# Allegro board RK3568_Template_LP4XD200P132SD6_43x28_1600MHz_V10_20210201.brd
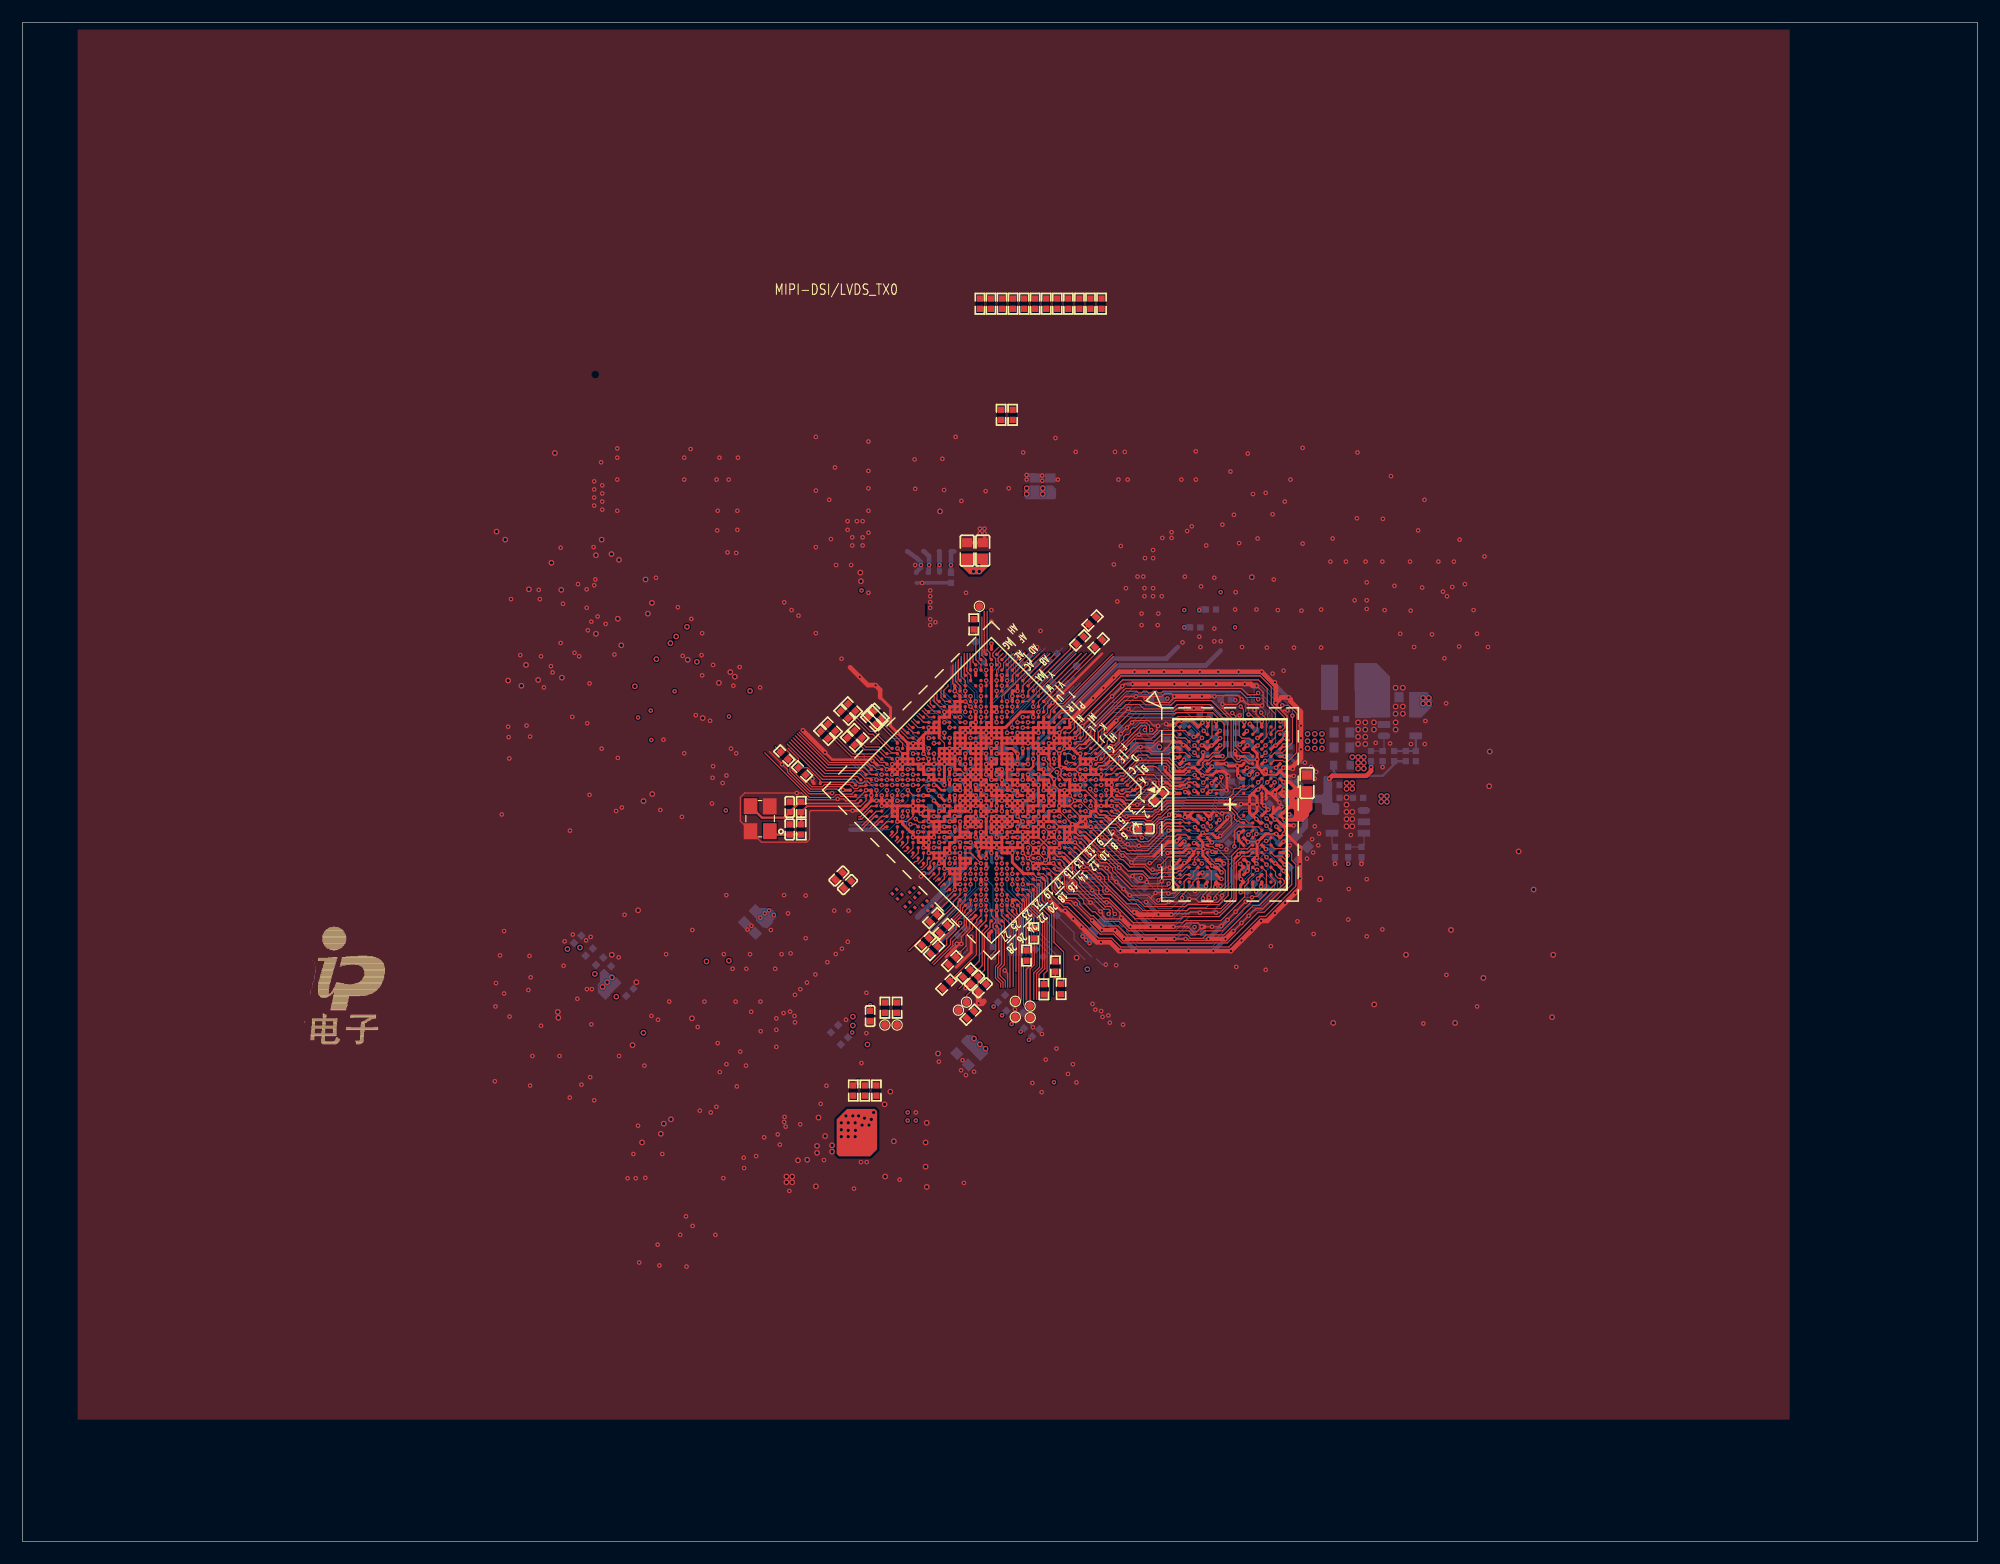
[diagram p0: board, top side]
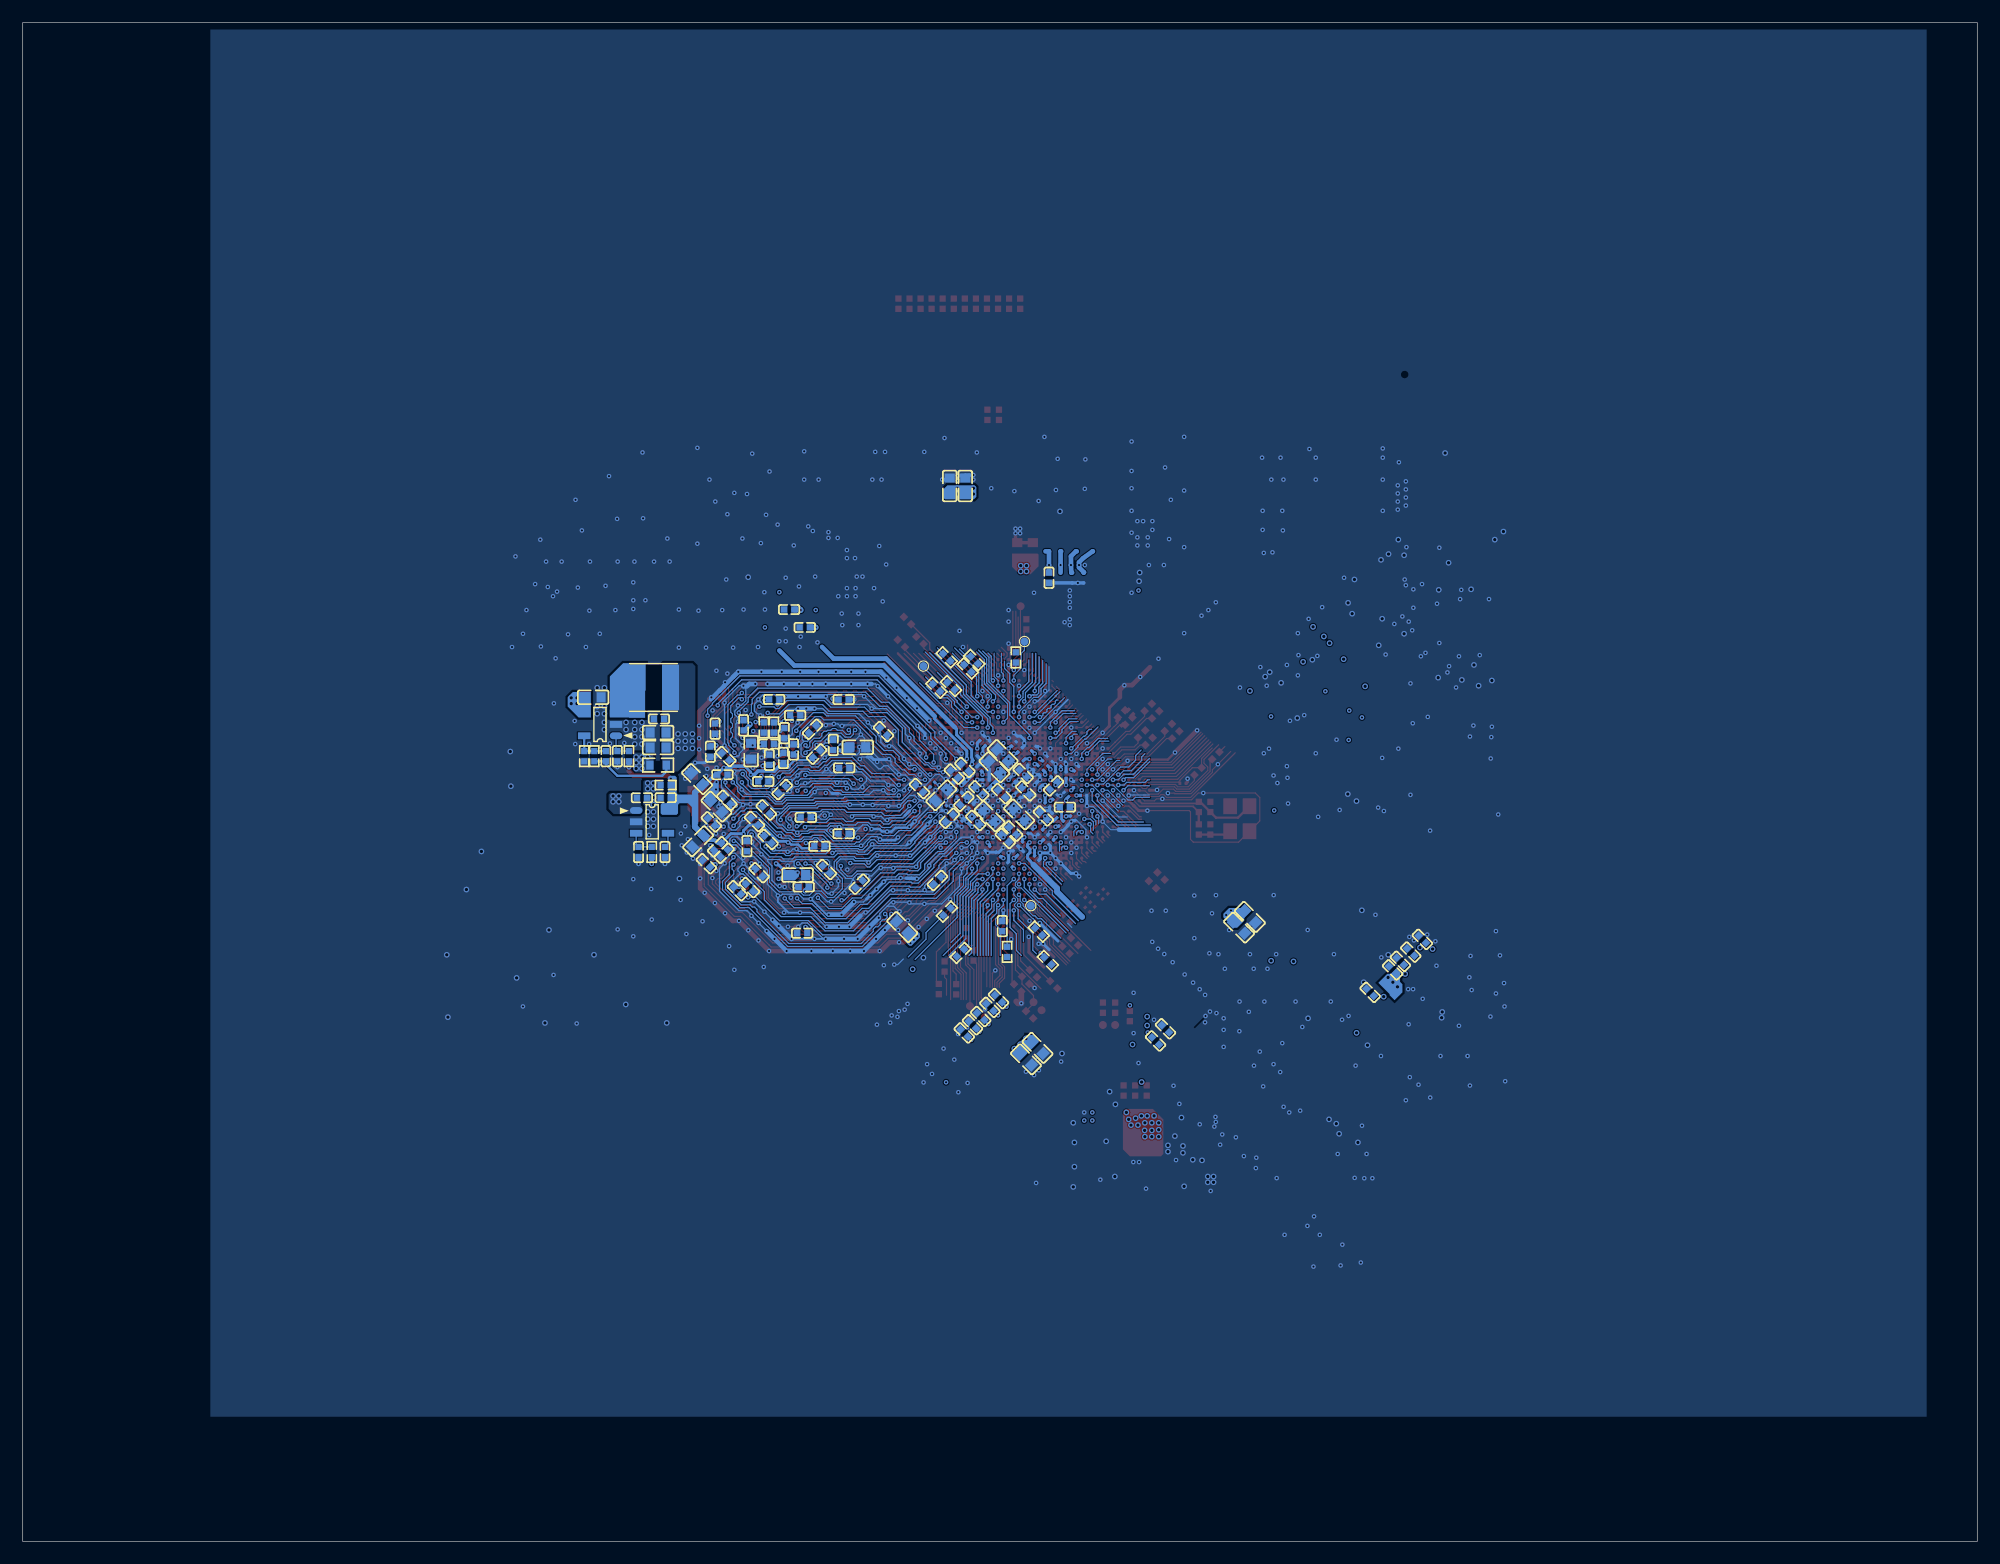
[diagram p1: board, bottom side, seen from below]

Outline 171.96 x 133.6 mm; copper layers: TOP, GND1, POWER, S1, GND2, BOTTOM. Coordinates in mm from the lower left corner of the outline.
Outline path: 0,133.6 0,0 171.96,0 171.96,133.6 0,133.6

## Design rules (mm)
net group DP_HDMI_TX1: nets HDMI_TX1N HDMI_TX1P
net group DP_HDMI_TX2: nets HDMI_TX2N HDMI_TX2P
net group EDP_TX_AUX: nets EDP_TX_AUXN EDP_TX_AUXP
net group EDP_TX_D0: nets EDP_TX_D1N EDP_TX_D2N
net group EDP_TXD0: nets EDP_TXD0N EDP_TXD0P
net group EDP_TXD1: nets EDP_TXD1N EDP_TXD1P
net group EDP_TXD2: nets EDP_TXD2N EDP_TXD2P
net group EDP_TXD3: nets EDP_TXD3N EDP_TXD3P
net group HDMI_TX0N: nets HDMI_TX0N HDMI_TX0N_PORT
net group HDMI_TX0P: nets HDMI_TX0P HDMI_TX0P_PORT
net group HDMI_TX1: nets HDMI_TX1N_PORT HDMI_TX1P_PORT
net group HDMI_TXCLKN: nets HDMI_TXCLKN HDMI_TXCLKN_PORT
net group HDMI_TXCLKP: nets HDMI_TXCLKP HDMI_TXCLKP_PORT
net group LPDDR4_CLK_A: nets LPDDR4_CLKN_A LPDDR4_CLKP_A
net group LPDDR4_CLK_B: nets LPDDR4_CLKN_B LPDDR4_CLKP_B
net group LPDDR4_DQS0_A: nets LPDDR4_DQS0N_A LPDDR4_DQS0P_A
net group LPDDR4_DQS0_B: nets LPDDR4_DQS0N_B LPDDR4_DQS0P_B
net group LPDDR4_DQS1_A: nets LPDDR4_DQS1N_A LPDDR4_DQS1P_A
net group LPDDR4_DQS1_B: nets LPDDR4_DQS1N_B LPDDR4_DQS1P_B
net group MIPI_CSI_RX_CLK0: nets MIPI_CSI_RX_CLK0N MIPI_CSI_RX_CLK0P
net group MIPI_CSI_RX_D0: nets MIPI_CSI_RX_D0N MIPI_CSI_RX_D0P
net group MIPI_CSI_RX_D1: nets MIPI_CSI_RX_D1N MIPI_CSI_RX_D1P
net group MIPI_CSI_RX_D2: nets MIPI_CSI_RX_D2N MIPI_CSI_RX_D2P
net group MIPI_CSI_RX_D3: nets MIPI_CSI_RX_D3N MIPI_CSI_RX_D3P
net group MIPI_DSI_TX1_CLK: nets MIPI_DSI_TX1_CLKN MIPI_DSI_TX1_CLKP
net group MIPI_DSI_TX1_D0: nets MIPI_DSI_TX1_D0N MIPI_DSI_TX1_D0P
net group MIPI_DSI_TX1_D1: nets MIPI_DSI_TX1_D1N MIPI_DSI_TX1_D1P
net group MIPI_DSI_TX1_D2: nets MIPI_DSI_TX1_D2N MIPI_DSI_TX1_D2P
net group MIPI_DSI_TX1_D3: nets MIPI_DSI_TX1_D3N MIPI_DSI_TX1_D3P
net group PCIE20_REFCLK: nets PCIE20_REFCLKN PCIE20_REFCLKP
net group PCIE20_RX: nets PCIE20_RXN PCIE20_RXP
net group PCIE20_TX: nets PCIE20_TXN PCIE20_TXP
net group PCIE30_RX0: nets PCIE30_RX0N PCIE30_RX0P
net group PCIE30_RX1: nets PCIE30_RX1N PCIE30_RX1P
net group PCIE30_TX0: nets PCIE30_TX0N PCIE30_TX0P
net group PCIE30_TX1: nets PCIE30_TX1N PCIE30_TX1P
net group PCIE_E: nets PCIE30_REFCLKN_IN PCIE30_REFCLKP_IN
net group USB3_OTG0_SSRX: nets SATA0_RXN SATA0_RXP
net group USB3_OTG0_SSTX: nets SATA0_TXN SATA0_TXP
net group DDR_CA: nets LPDDR4_RESETN

## Placement (name value [footprint] x y rotation side)
C1000  100nF  [C0402]  85.52 61.83 225 bottom
C1001  4.7uF  [C0402]  84.86 62.49 225 bottom
C1002  22uF  [C0603]  82.68 43.41 225 bottom
C1003  22uF  [C0603]  83.7 42.4 225 bottom
C1004  22uF  [C0603]  86.9 63.79 45 bottom
C1005  100nF  [C0201]  84.4 65.63 225 bottom
C1006  4.7uF  [C0402]  83.71 66.01 225 bottom
C1007  1uF  [C0402]  85.84 65.78 45 bottom
C1008  1uF  [C0402]  87.84 66.03 45 bottom
C1009  22uF  [C0603]  86.47 68.11 45 bottom
C1010  22uF  [C0603]  90.41 92.85 90 bottom
C1011  10uF  [C0603]  89.03 92.85 90 bottom
C1012  100nF  [C0201]  84.83 67.04 225 bottom
C1013  4.7uF  [C0402]  83.94 67.55 225 bottom
C1014  22uF  [C0603]  85.74 69.17 45 bottom
C1015  22uF  [C0603]  83.09 87.16 90 top
C1016  10uF  [C0603]  84.46 87.16 90 top
C1017  100nF  [C0201]  83.31 62.46 315 bottom
C1018  22uF  [C0603]  84.3 63.94 45 bottom
C1019  22uF  [C0603]  64.95 53.99 225 bottom
C1020  10uF  [C0603]  63.99 54.93 225 bottom
C1100  100nF  [C0201]  90.88 64.53 315 bottom
C1101  100nF  [C0201]  89.52 63.17 315 bottom
C1102  4.7uF  [C0402]  90 67.5 45 bottom
C1103  4.7uF  [C0402]  90.43 63.62 315 bottom
C1104  10uF  [C0603]  91.14 65.63 315 bottom
C1105  100nF  [C0201]  89.56 65.69 135 bottom
C1106  100nF  [C0201]  88.53 64.71 135 bottom
C1107  4.7uF  [C0402]  88.11 63.41 225 bottom
C1108  4.7uF  [C0402]  89.06 68.08 45 bottom
C1109  4.7uF  [C0402]  89.16 65.1 135 bottom
C1200  100nF  [C0201]  69.88 66.69 180 top
C1201  18pF  [C0402]  67.48 62.63 90 top
C1202  18pF  [C0402]  67.48 64.61 90 top
C1203  100nF  [C0201]  79.51 66.58 90 bottom
C1204  1uF  [C0402]  50.75 51.03 45 bottom
C1205  100nF  [C0201]  80.14 65.7 45 bottom
C1206  1uF  [C0402]  48.82 52.96 45 bottom
C1207  100nF  [C0201]  78.62 65.62 180 bottom
C1208  1uF  [C0402]  104.53 81.98 0 bottom
C1209  100nF  [C0201]  87.81 67.96 45 bottom
C1210  100nF  [C0201]  80.16 67.41 90 bottom
C1211  1uF  [C0402]  103.16 80.4 0 bottom
C1212  100nF  [C0201]  87.21 66.99 180 bottom
C1213  100nF  [C0201]  81.13 65.47 135 bottom
C1214  1uF  [C0402]  49.84 51.84 45 bottom
C1300  100nF  [C0201]  87.08 60.96 315 bottom
C1301  100nF  [C0201]  82.74 60.11 225 bottom
C1400  100nF  [C0402]  74.55 46.21 270 top
C1401  100nF  [C0201]  81.96 61.93 135 bottom
C1402  100nF  [C0201]  81.47 61.49 315 bottom
C1403  100nF  [C0201]  82.42 62.39 315 bottom
C1404  100nF  [C0201]  89.44 69.68 315 bottom
C1405  100nF  [C0201]  88.17 68.9 135 bottom
C1406  100nF  [C0201]  87.56 70.65 135 bottom
C1407  100nF  [C0201]  80.61 62.73 225 bottom
C1408  100nF  [C0201]  81.18 63.84 45 bottom
C1409  4.7uF  [C0402]  82.16 63.82 45 bottom
C1410  4.7uF  [C0402]  53.42 48.3 45 bottom
C1411  100nF  [C0201]  79.59 63.61 225 bottom
C1412  100nF  [C0201]  80.2 63.17 225 bottom
C1413  4.7uF  [C0402]  80.27 64.59 180 bottom
C1414  4.7uF  [C0402]  51.44 50.27 45 bottom
C1500  100nF  [C0201]  84.63 60.55 45 bottom
C1501  1nF  [C0402]  83.73 49.36 225 top
C1502  1nF  [C0402]  84.42 48.69 225 top
C1503  1nF  [C0402]  85.78 54.13 90 bottom
C1504  1nF  [C0402]  86.11 47.74 45 bottom
C1505  1nF  [C0402]  87.67 46.18 45 bottom
C1506  1nF  [C0402]  86.87 46.98 45 bottom
C1507  1nF  [C0402]  89.13 44.72 45 bottom
C1508  1nF  [C0402]  88.4 45.45 45 bottom
C1509  100nF  [C0201]  84.75 70.15 135 bottom
C1510  100nF  [C0201]  85.09 59.52 45 bottom
C1511  100nF  [C0201]  86.13 60.43 45 bottom
C1600  100nF  [C0201]  83 69.74 135 bottom
C1601  100nF  [C0201]  83.73 68.48 225 bottom
C1602  100nF  [C0201]  87.08 70.19 135 bottom
C1603  1uF  [C0402]  81.67 84.77 270 bottom
C1700  100nF  [C0201]  81.57 68.4 135 bottom
C1701  100nF  [C0201]  82.35 67.63 315 bottom
C1702  100nF  [C0201]  82.03 68.87 135 bottom
C1703  100nF  [C0201]  82.83 68.06 315 bottom
C1704  100nF  [C0201]  79.81 55.7 225 top
C1705  100nF  [C0201]  79.36 56.15 225 top
C1706  100nF  [C0201]  78.29 55.57 225 top
C1707  100nF  [C0201]  78.67 56.84 225 top
C1708  100nF  [C0201]  78.22 57.29 225 top
C1709  100nF  [C0201]  77.84 56.02 225 top
C1710  100nF  [C0201]  77.15 56.71 225 top
C1711  100nF  [C0201]  76.69 57.17 225 top
C1712  100nF  [C0201]  79.26 67.98 135 bottom
C1713  100nF  [C0201]  81.29 67.47 135 bottom
C1714  100nF  [C0201]  82.58 66.6 45 bottom
C1715  1uF  [C0402]  71.81 58.53 225 top
C1716  1uF  [C0402]  72.56 57.77 225 top
C1717  100nF  [C0201]  83.73 60.89 315 bottom
C1718  100nF  [C0201]  84.19 61.35 315 bottom
C1719  4.7uF  [C0402]  81.26 66.46 135 bottom
C1720  4.7uF  [C0402]  71.42 45.09 45 bottom
C1800  100nF  [C0201]  84.21 69.63 135 bottom
C1900  100nF  [C0201]  88.02 61.74 315 bottom
C3800  1nF  [C0402]  108.25 61.16 90 bottom
C3801  22uF  [C0603]  98.49 69.86 180 bottom
C3802  10uF  [C0603]  110.92 64.64 225 bottom
C3803  10uF  [C0603]  112.99 66.71 90 top
C3804  1uF  [C0402]  108.54 71.79 90 bottom
C3805  100nF  [C0402]  99.95 65.52 225 top
C3806  100nF  [C0402]  111.37 63.29 45 bottom
C3807  100nF  [C0402]  106.39 61.75 225 bottom
C3808  100nF  [C0402]  105.15 66.14 315 bottom
C3809  100nF  [C0402]  106.27 68.75 90 bottom
C3810  100nF  [C0402]  104 72.67 180 bottom
C3811  100nF  [C0402]  109.09 57.24 45 bottom
C3812  100nF  [C0402]  103.25 57.57 180 bottom
C3813  100nF  [C0402]  106.55 64.34 45 bottom
C3814  100nF  [C0402]  93.06 66.23 45 bottom
C3815  100nF  [C0402]  106.81 66.85 180 bottom
C3816  100nF  [C0402]  110.01 65.2 45 bottom
C3817  100nF  [C0402]  99.73 62.25 180 bottom
C3818  100nF  [C0402]  98.63 62.68 0 top
C3819  100nF  [C0402]  99.68 68.04 180 bottom
C3820  100nF  [C0402]  103.07 63.69 180 bottom
C3821  100nF  [C0402]  98.37 57.81 315 bottom
C3822  100nF  [C0402]  103.38 53.5 0 bottom
C3823  10uF  [C0603]  112.63 67.06 45 bottom
C3824  100nF  [C0402]  107.57 63.34 45 bottom
C3825  100nF  [C0402]  101.87 61.15 180 bottom
C3826  100nF  [C0402]  110.82 61.1 315 bottom
C3827  1uF  [C0402]  117.48 65.42 180 bottom
C3828  22uF  [C0603]  103.78 58.62 180 bottom
C3829  10uF  [C0603]  94.58 54.04 45 bottom
C3830  10uF  [C0603]  107.87 69.51 270 bottom
C3831  1uF  [C0402]  102.46 71.45 135 bottom
C3832  100nF  [C0402]  104.13 69.67 90 bottom
C3833  100nF  [C0402]  110.12 69.04 45 bottom
C3834  100nF  [C0402]  104.95 71.1 270 bottom
C3835  100nF  [C0402]  111.82 59.61 45 bottom
C3836  100nF  [C0402]  108.02 57.51 225 bottom
C3837  100nF  [C0402]  100.65 70.07 90 bottom
C3838  100nF  [C0402]  110.24 60.53 315 bottom
C3839  100nF  [C0402]  107.17 58.82 225 bottom
C3840  100nF  [C0402]  101.26 59.11 225 bottom
C3841  100nF  [C0402]  106.31 70.14 0 bottom
C3842  100nF  [C0402]  111.46 69.47 270 bottom
C3843  100nF  [C0402]  111.05 71.5 270 bottom
C3844  100nF  [C0402]  99.73 74.06 180 bottom
C3845  100nF  [C0402]  96.23 71.24 45 bottom
C3846  100nF  [C0402]  91.49 58.14 135 bottom
C3847  4.7uF  [C0402]  115.39 65.42 0 bottom
C3848  10uF  [C0603]  112.54 61.59 315 bottom
C3849  100nF  [C0402]  110.4 67.45 180 bottom
C3850  100nF  [C0402]  105.03 68.92 90 bottom
C3851  100nF  [C0402]  102.1 69.27 135 bottom
C3852  DNP  [C0402]  115.46 60.64 270 bottom
C3853  DNP  [C0402]  117.78 60.64 270 bottom
C3854  100nF  [C0402]  105.84 74.07 180 bottom
C3855  10uF  [C0603]  121.77 74.26 180 bottom
C3856  100nF  [C0402]  119.64 69.07 270 bottom
C3857  100pF  [C0402]  120.66 69.07 90 bottom
C3858  22uF  [C0603]  116.06 71.16 0 bottom
C3859  100nF  [C0402]  115.98 72.35 0 bottom
C3860  10uF  [C0603]  116.06 69.83 0 bottom
C*  4.7uF  [unnamed]  72.29 44.02 45 bottom
L1700  NC  [RP2_0405]  74.97 72.47 315 top
L3800  2.2uH  [IND_404026]  116.47 75.12 180 bottom
R1101  120R  [R0201]  91.92 66.58 315 bottom
R1200  22R  [R0402]  68.49 62.63 90 top
R1201  0R  [R0402]  68.56 67.74 315 top
R1202  1M  [R0402]  68.49 64.61 90 top
R1203  22R  [R0402]  66.99 69.12 135 top
R1204  2.2K  [R0402]  87.13 108.88 270 top
R1205  2.2K  [R0402]  86.15 108.88 270 top
R1206  2.2K  [R0402]  85.18 108.88 270 top
R1207  2.2K  [R0402]  84.21 108.88 270 top
R1300  22R  [R0402]  88.31 51.53 270 top
R1301  22R  [R0402]  88.95 53.49 270 top
R1302  22R  [R0402]  75.85 46.94 270 top
R1303  22R  [R0402]  76.93 46.94 270 top
R1304  22R  [R0402]  80.1 54.83 225 top
R1400  200R  [R0201]  81.81 64.78 225 bottom
R1500  22R  [R0402]  83.05 49.95 225 top
R1501  22R  [R0402]  81.25 48.97 225 top
R1502  22R  [R0402]  81.77 51.06 225 top
R1503  22R  [R0402]  81.77 51.06 225 bottom
R1504  22R  [R0402]  80.17 52.02 225 top
R1505  22R  [R0402]  81.01 53.87 225 top
R1506  22R  [R0402]  79.42 52.76 225 top
R1507  22R  [R0402]  85.35 51.85 270 bottom
R1508  0R  [R0402]  82.57 53.64 225 bottom
R1509  0R  [R0402]  74.09 39.65 270 top
R1510  0R  [R0402]  75.1 39.65 270 top
R1511  0R  [R0402]  73.07 39.65 270 top
R1512  10K  [R0402]  83.38 46.32 45 top
R1600  22R  [R0402]  90.66 77.77 45 bottom
R1601  22R  [R0402]  88.23 77.54 45 bottom
R1602  22R  [R0402]  88.81 76.8 45 bottom
R1603  22R  [R0402]  94.12 81 45 top
R1604  22R  [R0402]  93.02 79.27 45 top
R1605  22R  [R0402]  90.29 75.24 45 bottom
R1606  2.2K  [R0402]  92.97 108.88 270 top
R1607  2.2K  [R0402]  91.99 108.88 270 top
R1608  22R  [R0402]  94.66 78.99 45 top
R1609  22R  [R0402]  91.57 75.09 45 bottom
R1610  0R  [R0402]  87.09 99.11 90 top
R1611  0R  [R0402]  86.07 99.11 90 top
R1700  2.2R  [R0402]  72.87 70.37 135 top
R1701  2.2R  [R0402]  73.52 71.02 135 top
R1702  2.2R  [R0402]  70.52 70.95 135 top
R1703  2.2R  [R0402]  71.17 71.59 135 top
R1704  2.2R  [R0402]  72.29 72.72 135 top
R1705  2.2R  [R0402]  72.94 73.36 135 top
R1706  2.2R  [R0402]  74.65 72.15 135 top
R1707  2.2R  [R0402]  75.29 72.8 135 top
R1708  1.62K  [R0201]  80.42 68.38 135 bottom
R1800  10K  [R0402]  88.1 108.88 270 top
R1801  10K  [R0402]  89.07 108.88 270 top
R1802  22R  [R0402]  83.66 80.67 90 top
R1803  22R  [R0402]  84.59 77.76 90 bottom
R1804  2.2K  [R0402]  91.02 108.88 270 top
R1805  2.2K  [R0402]  90.05 108.88 270 top
R1900  2.2K  [R0402]  94.91 108.88 270 top
R1901  2.2K  [R0402]  93.94 108.88 270 top
R1902  22R  [R0402]  90.85 50.57 270 top
R1903  22R  [R0402]  91.36 48.59 270 top
R1904  22R  [R0402]  90.65 55.39 315 bottom
R1905  22R  [R0402]  89.83 48.56 270 top
R1906  22R  [R0402]  89.45 51.76 315 bottom
R3800  240R  [R0402]  106.76 71.59 90 bottom
R3801  240R  [R0402]  105.87 71.59 90 bottom
R3802  0R  [R0402]  115.39 66.53 180 bottom
R3804  0R  [R0603]  116.06 68.29 0 bottom
R3806  100K  [R0402]  118.62 69.07 90 bottom
R3807  2K  [R0402]  121.67 69.07 90 bottom
R3808  10K  [R0402]  116.62 60.64 90 bottom
R3809  100K  [R0402]  122.56 69.07 270 bottom
TP1300  TP_0.7  [TP_0R70]  87.32 47.51 90 top
TP1301  TP_0.7  [TP_0R70]  87.32 46.12 90 top
TP1302  TP_0.7  [TP_0R70]  88.62 47.09 0 top
TP1303  TP_0.7  [TP_0R70]  88.64 46.07 0 top
TP1304  TP_0.7  [TP_0R70]  75.85 45.42 180 top
TP1305  TP_0.7  [TP_0R70]  76.93 45.42 180 top
TP1500  TP_0.7  [TP_0R70]  83.27 55.92 315 bottom
TP1501  TP_0.7  [TP_0R70]  83.03 47.44 45 top
TP1502  TP_0.7  [TP_0R70]  82.32 46.73 45 top
TP1600  TP_0.7  [TP_0R70]  92.72 77 180 bottom
TP1800  TP_0.7  [TP_0R70]  83.83 79.16 180 bottom
TP1801  TP_0.7  [TP_0R70]  84.17 82.26 0 top
U1000  RK3568  [BGA636_19R00X19R00X1R20]  85.22 66.08 225 top
U3800  LPDDR4_200P  [BGA200_15R00X10R00X0R90]  106.22 64.83 0 top
U3801  SY8089AAC  [SOT_23_5]  119.76 70.87 0 bottom
U3802  PT5108E23E-18  [SOT_23_5]  117.99 64.3 180 bottom
Y1200  24MHz  [CRY4_3R20X2R50X0R80]  64.88 63.57 90 top

## Library data of the parts
C1000-C1020 C1100-C1109 C1200-C1214 C1300 C1301 C1400-C1414 C1500-C1511 C1600-C1603 C1700-C1720 C1800 C1900 C3800-C3860 = CAP NP
L1700 = INDUCTOR COM
L3800 = INDUCTORS OF FERRITE
R1101 R1200-R1207 R1300-R1304 R1400 R1500-R1512 R1600-R1611 R1700-R1703 R1800-R1805 R1900-R1906 R3800-R3802 R3804 R3806-R3809 = RESISTOR
R1704-R1708 = RESISTOR: signal model: RESISTOR_R0201_2.2R_2.2R
TP1300-TP1305 TP1500-TP1502 TP1600 TP1800 TP1801 = TP
U1000 = SOC_RK3568
U3800 = LPDDR4_200P_0
U3801 = DCDC_SY8088
U3802 = LDO_PT5108
Y1200 = CRYSTAL_4P

## Footprints (pads in the part's own frame, mm; a bottom-side part is the same pattern mirrored in y, then rotated)
BGA200_15R00X10R00X0R90
  round 0.3 smd: A1(-4.4,6.825) A2(-3.6,6.825) A3(-2.8,6.825) A4(-2,6.825) A5(-1.2,6.825) A8(1.2,6.825) A9(2,6.825) A10(2.8,6.825) A11(3.6,6.825) A12(4.4,6.825) AA1(-4.4,-6.175) AA2(-3.6,-6.175) AA3(-2.8,-6.175) AA4(-2,-6.175) AA5(-1.2,-6.175) AA8(1.2,-6.175) AA9(2,-6.175) AA10(2.8,-6.175) AA11(3.6,-6.175) AA12(4.4,-6.175) AB1(-4.4,-6.825) AB2(-3.6,-6.825) AB3(-2.8,-6.825) AB4(-2,-6.825) AB5(-1.2,-6.825) AB8(1.2,-6.825) AB9(2,-6.825) AB10(2.8,-6.825) AB11(3.6,-6.825) AB12(4.4,-6.825) B1(-4.4,6.175) B2(-3.6,6.175) B3(-2.8,6.175) B4(-2,6.175) B5(-1.2,6.175) B8(1.2,6.175) B9(2,6.175) B10(2.8,6.175) B11(3.6,6.175) B12(4.4,6.175) C1(-4.4,5.525) C2(-3.6,5.525) C3(-2.8,5.525) C4(-2,5.525) C5(-1.2,5.525) C8(1.2,5.525) C9(2,5.525) C10(2.8,5.525) C11(3.6,5.525) C12(4.4,5.525) D1(-4.4,4.875) D2(-3.6,4.875) D3(-2.8,4.875) D4(-2,4.875) D5(-1.2,4.875) D8(1.2,4.875) D9(2,4.875) D10(2.8,4.875) D11(3.6,4.875) D12(4.4,4.875) E1(-4.4,4.225) E2(-3.6,4.225) E3(-2.8,4.225) E4(-2,4.225) E5(-1.2,4.225) E8(1.2,4.225) E9(2,4.225) E10(2.8,4.225) E11(3.6,4.225) E12(4.4,4.225) F1(-4.4,3.575) F2(-3.6,3.575) F3(-2.8,3.575) F4(-2,3.575) F5(-1.2,3.575) F8(1.2,3.575) F9(2,3.575) F10(2.8,3.575) F11(3.6,3.575) F12(4.4,3.575) G1(-4.4,2.925) G2(-3.6,2.925) G3(-2.8,2.925) G4(-2,2.925) G5(-1.2,2.925) G8(1.2,2.925) G9(2,2.925) G10(2.8,2.925) G11(3.6,2.925) G12(4.4,2.925) H1(-4.4,2.275) H2(-3.6,2.275) H3(-2.8,2.275) H4(-2,2.275) H5(-1.2,2.275) H8(1.2,2.275) H9(2,2.275) H10(2.8,2.275) H11(3.6,2.275) H12(4.4,2.275) J1(-4.4,1.625) J2(-3.6,1.625) J3(-2.8,1.625) J4(-2,1.625) J5(-1.2,1.625) J8(1.2,1.625) J9(2,1.625) J10(2.8,1.625) J11(3.6,1.625) J12(4.4,1.625) K1(-4.4,0.975) K2(-3.6,0.975) K3(-2.8,0.975) K4(-2,0.975) K5(-1.2,0.975) K8(1.2,0.975) K9(2,0.975) K10(2.8,0.975) K11(3.6,0.975) K12(4.4,0.975) N1(-4.4,-0.975) N2(-3.6,-0.975) N3(-2.8,-0.975) N4(-2,-0.975) N5(-1.2,-0.975) N8(1.2,-0.975) N9(2,-0.975) N10(2.8,-0.975) N11(3.6,-0.975) N12(4.4,-0.975) P1(-4.4,-1.625) P2(-3.6,-1.625) P3(-2.8,-1.625) P4(-2,-1.625) P5(-1.2,-1.625) P8(1.2,-1.625) P9(2,-1.625) P10(2.8,-1.625) P11(3.6,-1.625) P12(4.4,-1.625) R1(-4.4,-2.275) R2(-3.6,-2.275) R3(-2.8,-2.275) R4(-2,-2.275) R5(-1.2,-2.275) R8(1.2,-2.275) R9(2,-2.275) R10(2.8,-2.275) R11(3.6,-2.275) R12(4.4,-2.275) T1(-4.4,-2.925) T2(-3.6,-2.925) T3(-2.8,-2.925) T4(-2,-2.925) T5(-1.2,-2.925) T8(1.2,-2.925) T9(2,-2.925) T10(2.8,-2.925) T11(3.6,-2.925) T12(4.4,-2.925) U1(-4.4,-3.575) U2(-3.6,-3.575) U3(-2.8,-3.575) U4(-2,-3.575) U5(-1.2,-3.575) U8(1.2,-3.575) U9(2,-3.575) U10(2.8,-3.575) U11(3.6,-3.575) U12(4.4,-3.575) V1(-4.4,-4.225) V2(-3.6,-4.225) V3(-2.8,-4.225) V4(-2,-4.225) V5(-1.2,-4.225) V8(1.2,-4.225) V9(2,-4.225) V10(2.8,-4.225) V11(3.6,-4.225) V12(4.4,-4.225) W1(-4.4,-4.875) W2(-3.6,-4.875) W3(-2.8,-4.875) W4(-2,-4.875) W5(-1.2,-4.875) W8(1.2,-4.875) W9(2,-4.875) W10(2.8,-4.875) W11(3.6,-4.875) W12(4.4,-4.875) Y1(-4.4,-5.525) Y2(-3.6,-5.525) Y3(-2.8,-5.525) Y4(-2,-5.525) Y5(-1.2,-5.525) Y8(1.2,-5.525) Y9(2,-5.525) Y10(2.8,-5.525) Y11(3.6,-5.525) Y12(4.4,-5.525)
BGA636_19R00X19R00X1R20
  round 0.3 smd: A1(-8.775,8.775) A2(-8.125,8.775) A3(-7.475,8.775) A4(-6.825,8.775) A5(-6.175,8.775) A6(-5.525,8.775) A7(-4.875,8.775) A8(-4.225,8.775) A9(-3.575,8.775) A10(-2.925,8.775) A11(-2.275,8.775) A12(-1.625,8.775) A13(-0.975,8.775) A14(-0.325,8.775) A15(0.325,8.775) A16(0.975,8.775) A17(1.625,8.775) A18(2.275,8.775) A19(2.925,8.775) A20(3.575,8.775) A21(4.225,8.775) A22(4.875,8.775) A23(5.525,8.775) A24(6.175,8.775) A25(6.825,8.775) A26(7.475,8.775) A27(8.125,8.775) A28(8.775,8.775) AA1(-8.775,-4.225) AA2(-8.125,-4.225) AA3(-7.475,-4.225) AA4(-6.825,-4.225) AA5(-6.175,-4.225) AA6(-5.525,-4.225) AA7(-4.875,-4.225) AA9(-3.575,-4.225) AA11(-2.275,-4.225) AA12(-1.625,-4.225) AA14(-0.325,-4.225) AA15(0.325,-4.225) AA17(1.625,-4.225) AA18(2.275,-4.225) AA20(3.575,-4.225) AA22(4.875,-4.225) AA23(5.525,-4.225) AA24(6.175,-4.225) AA25(6.825,-4.225) AA26(7.475,-4.225) AA27(8.125,-4.225) AA28(8.775,-4.225) AB1(-8.775,-4.875) AB2(-8.125,-4.875) AB5(-6.175,-4.875) AB6(-5.525,-4.875) AB8(-4.225,-4.875) AB9(-3.575,-4.875) AB11(-2.275,-4.875) AB12(-1.625,-4.875) AB14(-0.325,-4.875) AB15(0.325,-4.875) AB17(1.625,-4.875) AB18(2.275,-4.875) AB20(3.575,-4.875) AB21(4.225,-4.875) AB23(5.525,-4.875) AB24(6.175,-4.875) AB27(8.125,-4.875) AB28(8.775,-4.875) AC1(-8.775,-5.525) AC2(-8.125,-5.525) AC3(-7.475,-5.525) AC4(-6.825,-5.525) AC5(-6.175,-5.525) AC7(-4.875,-5.525) AC8(-4.225,-5.525) AC9(-3.575,-5.525) AC11(-2.275,-5.525) AC12(-1.625,-5.525) AC14(-0.325,-5.525) AC15(0.325,-5.525) AC17(1.625,-5.525) AC18(2.275,-5.525) AC20(3.575,-5.525) AC21(4.225,-5.525) AC22(4.875,-5.525) AC24(6.175,-5.525) AC25(6.825,-5.525) AC26(7.475,-5.525) AC27(8.125,-5.525) AC28(8.775,-5.525) AD1(-8.775,-6.175) AD2(-8.125,-6.175) AD3(-7.475,-6.175) AD4(-6.825,-6.175) AD6(-5.525,-6.175) AD7(-4.875,-6.175) AD8(-4.225,-6.175) AD9(-3.575,-6.175) AD11(-2.275,-6.175) AD12(-1.625,-6.175) AD14(-0.325,-6.175) AD15(0.325,-6.175) AD17(1.625,-6.175) AD18(2.275,-6.175) AD20(3.575,-6.175) AD21(4.225,-6.175) AD22(4.875,-6.175) AD23(5.525,-6.175) AD25(6.825,-6.175) AD26(7.475,-6.175) AD27(8.125,-6.175) AD28(8.775,-6.175) AE1(-8.775,-6.825) AE2(-8.125,-6.825) AE3(-7.475,-6.825) AE5(-6.175,-6.825) AE6(-5.525,-6.825) AE8(-4.225,-6.825) AE9(-3.575,-6.825) AE11(-2.275,-6.825) AE12(-1.625,-6.825) AE14(-0.325,-6.825) AE15(0.325,-6.825) AE17(1.625,-6.825) AE18(2.275,-6.825) AE20(3.575,-6.825) AE21(4.225,-6.825) AE23(5.525,-6.825) AE24(6.175,-6.825) AE26(7.475,-6.825) AE27(8.125,-6.825) AE28(8.775,-6.825) AF1(-8.775,-7.475) AF2(-8.125,-7.475) AF3(-7.475,-7.475) AF4(-6.825,-7.475) AF5(-6.175,-7.475) AF6(-5.525,-7.475) AF8(-4.225,-7.475) AF9(-3.575,-7.475) AF11(-2.275,-7.475) AF12(-1.625,-7.475) AF14(-0.325,-7.475) AF15(0.325,-7.475) AF17(1.625,-7.475) AF18(2.275,-7.475) AF20(3.575,-7.475) AF21(4.225,-7.475) AF23(5.525,-7.475) AF24(6.175,-7.475) AF25(6.825,-7.475) AF26(7.475,-7.475) AF27(8.125,-7.475) AF28(8.775,-7.475) AG1(-8.775,-8.125) AG2(-8.125,-8.125) AG3(-7.475,-8.125) AG4(-6.825,-8.125) AG5(-6.175,-8.125) AG6(-5.525,-8.125) AG7(-4.875,-8.125) AG8(-4.225,-8.125) AG9(-3.575,-8.125) AG10(-2.925,-8.125) AG11(-2.275,-8.125) AG12(-1.625,-8.125) AG13(-0.975,-8.125) AG14(-0.325,-8.125) AG15(0.325,-8.125) AG16(0.975,-8.125) AG17(1.625,-8.125) AG18(2.275,-8.125) AG19(2.925,-8.125) AG20(3.575,-8.125) AG21(4.225,-8.125) AG22(4.875,-8.125) AG23(5.525,-8.125) AG24(6.175,-8.125) AG25(6.825,-8.125) AG26(7.475,-8.125) AG27(8.125,-8.125) AG28(8.775,-8.125) AH1(-8.775,-8.775) AH2(-8.125,-8.775) AH3(-7.475,-8.775) AH4(-6.825,-8.775) AH5(-6.175,-8.775) AH6(-5.525,-8.775) AH7(-4.875,-8.775) AH8(-4.225,-8.775) AH9(-3.575,-8.775) AH10(-2.925,-8.775) AH11(-2.275,-8.775) AH12(-1.625,-8.775) AH13(-0.975,-8.775) AH14(-0.325,-8.775) AH15(0.325,-8.775) AH16(0.975,-8.775) AH17(1.625,-8.775) AH18(2.275,-8.775) AH19(2.925,-8.775) AH20(3.575,-8.775) AH21(4.225,-8.775) AH22(4.875,-8.775) AH23(5.525,-8.775) AH24(6.175,-8.775) AH25(6.825,-8.775) AH26(7.475,-8.775) AH27(8.125,-8.775) AH28(8.775,-8.775) B1(-8.775,8.125) B2(-8.125,8.125) B3(-7.475,8.125) B4(-6.825,8.125) B5(-6.175,8.125) B6(-5.525,8.125) B7(-4.875,8.125) B8(-4.225,8.125) B9(-3.575,8.125) B10(-2.925,8.125) B11(-2.275,8.125) B12(-1.625,8.125) B13(-0.975,8.125) B14(-0.325,8.125) B15(0.325,8.125) B16(0.975,8.125) B17(1.625,8.125) B18(2.275,8.125) B19(2.925,8.125) B20(3.575,8.125) B21(4.225,8.125) B22(4.875,8.125) B23(5.525,8.125) B24(6.175,8.125) B25(6.825,8.125) B26(7.475,8.125) B27(8.125,8.125) B28(8.775,8.125) C1(-8.775,7.475) C2(-8.125,7.475) C3(-7.475,7.475) C4(-6.825,7.475) C5(-6.175,7.475) C6(-5.525,7.475) C8(-4.225,7.475) C9(-3.575,7.475) C11(-2.275,7.475) C12(-1.625,7.475) C14(-0.325,7.475) C15(0.325,7.475) C17(1.625,7.475) C18(2.275,7.475) C20(3.575,7.475) C21(4.225,7.475) C23(5.525,7.475) C24(6.175,7.475) C25(6.825,7.475) C26(7.475,7.475) C27(8.125,7.475) C28(8.775,7.475) D1(-8.775,6.825) D2(-8.125,6.825) D3(-7.475,6.825) D5(-6.175,6.825) D6(-5.525,6.825) D8(-4.225,6.825) D9(-3.575,6.825) D11(-2.275,6.825) D12(-1.625,6.825) D14(-0.325,6.825) D15(0.325,6.825) D17(1.625,6.825) D18(2.275,6.825) D20(3.575,6.825) D21(4.225,6.825) D23(5.525,6.825) D24(6.175,6.825) D26(7.475,6.825) D27(8.125,6.825) D28(8.775,6.825) E1(-8.775,6.175) E2(-8.125,6.175) E3(-7.475,6.175) E4(-6.825,6.175) E6(-5.525,6.175) E7(-4.875,6.175) E8(-4.225,6.175) E9(-3.575,6.175) E11(-2.275,6.175) E12(-1.625,6.175) E14(-0.325,6.175) E15(0.325,6.175) E17(1.625,6.175) E18(2.275,6.175) E20(3.575,6.175) E21(4.225,6.175) E22(4.875,6.175) E23(5.525,6.175) E25(6.825,6.175) E26(7.475,6.175) E27(8.125,6.175) E28(8.775,6.175) F1(-8.775,5.525) F2(-8.125,5.525) F3(-7.475,5.525) F4(-6.825,5.525) F5(-6.175,5.525) F7(-4.875,5.525) F8(-4.225,5.525) F9(-3.575,5.525) F11(-2.275,5.525) F12(-1.625,5.525) F14(-0.325,5.525) F15(0.325,5.525) F17(1.625,5.525) F18(2.275,5.525) F20(3.575,5.525) F21(4.225,5.525) F22(4.875,5.525) F24(6.175,5.525) F25(6.825,5.525) F26(7.475,5.525) F27(8.125,5.525) F28(8.775,5.525) G1(-8.775,4.875) G2(-8.125,4.875) G5(-6.175,4.875) G6(-5.525,4.875) G8(-4.225,4.875) G9(-3.575,4.875) G11(-2.275,4.875) G12(-1.625,4.875) G14(-0.325,4.875) G15(0.325,4.875) G17(1.625,4.875) G18(2.275,4.875) G20(3.575,4.875) G21(4.225,4.875) G23(5.525,4.875) G24(6.175,4.875) G27(8.125,4.875) G28(8.775,4.875) H1(-8.775,4.225) H2(-8.125,4.225) H3(-7.475,4.225) H4(-6.825,4.225) H5(-6.175,4.225) H6(-5.525,4.225) H7(-4.875,4.225) H9(-3.575,4.225) H11(-2.275,4.225) H12(-1.625,4.225) H14(-0.325,4.225) H15(0.325,4.225) H17(1.625,4.225) H18(2.275,4.225) H20(3.575,4.225) H22(4.875,4.225) H23(5.525,4.225) H24(6.175,4.225) H25(6.825,4.225) H26(7.475,4.225) H27(8.125,4.225) H28(8.775,4.225) J1(-8.775,3.575) J2(-8.125,3.575) J3(-7.475,3.575) J4(-6.825,3.575) J5(-6.175,3.575) J6(-5.525,3.575) J7(-4.875,3.575) J8(-4.225,3.575) J9(-3.575,3.575) J11(-2.275,3.575) J12(-1.625,3.575) J14(-0.325,3.575) J15(0.325,3.575) J17(1.625,3.575) J18(2.275,3.575) J20(3.575,3.575) J21(4.225,3.575) J22(4.875,3.575) J23(5.525,3.575) J24(6.175,3.575) J25(6.825,3.575) J26(7.475,3.575) J27(8.125,3.575) J28(8.775,3.575) K1(-8.775,2.925) K2(-8.125,2.925) K10(-2.925,2.925) K11(-2.275,2.925) K12(-1.625,2.925) K13(-0.975,2.925) K14(-0.325,2.925) K15(0.325,2.925) K16(0.975,2.925) K17(1.625,2.925) K18(2.275,2.925) K19(2.925,2.925) K27(8.125,2.925) K28(8.775,2.925) L1(-8.775,2.275) L2(-8.125,2.275) L3(-7.475,2.275) L4(-6.825,2.275) L5(-6.175,2.275) L6(-5.525,2.275) L7(-4.875,2.275) L8(-4.225,2.275) L9(-3.575,2.275) L10(-2.925,2.275) L11(-2.275,2.275) L12(-1.625,2.275) L13(-0.975,2.275) L14(-0.325,2.275) L15(0.325,2.275) L16(0.975,2.275) L17(1.625,2.275) L18(2.275,2.275) L19(2.925,2.275) L20(3.575,2.275) L21(4.225,2.275) L22(4.875,2.275) L23(5.525,2.275) L24(6.175,2.275) L25(6.825,2.275) L26(7.475,2.275) L27(8.125,2.275) L28(8.775,2.275) M1(-8.775,1.625) M2(-8.125,1.625) M3(-7.475,1.625) M4(-6.825,1.625) M5(-6.175,1.625) M6(-5.525,1.625) M7(-4.875,1.625) M8(-4.225,1.625) M9(-3.575,1.625) M10(-2.925,1.625) M11(-2.275,1.625) M12(-1.625,1.625) M13(-0.975,1.625) M14(-0.325,1.625) M15(0.325,1.625) M16(0.975,1.625) M17(1.625,1.625) M18(2.275,1.625) M19(2.925,1.625) M20(3.575,1.625) M21(4.225,1.625) M22(4.875,1.625) M23(5.525,1.625) M24(6.175,1.625) M25(6.825,1.625) M26(7.475,1.625) M27(8.125,1.625) M28(8.775,1.625) N1(-8.775,0.975) N2(-8.125,0.975) N10(-2.925,0.975) N11(-2.275,0.975) N12(-1.625,0.975) N13(-0.975,0.975) N14(-0.325,0.975) N15(0.325,0.975) N16(0.975,0.975) N17(1.625,0.975) N18(2.275,0.975) N19(2.925,0.975) N27(8.125,0.975) N28(8.775,0.975) P1(-8.775,0.325) P2(-8.125,0.325) P3(-7.475,0.325) P4(-6.825,0.325) P5(-6.175,0.325) P6(-5.525,0.325) P7(-4.875,0.325) P8(-4.225,0.325) P9(-3.575,0.325) P10(-2.925,0.325) P11(-2.275,0.325) P12(-1.625,0.325) P13(-0.975,0.325) P14(-0.325,0.325) P15(0.325,0.325) P16(0.975,0.325) P17(1.625,0.325) P18(2.275,0.325) P19(2.925,0.325) P20(3.575,0.325) P21(4.225,0.325) P22(4.875,0.325) P23(5.525,0.325) P24(6.175,0.325) P25(6.825,0.325) P26(7.475,0.325) P27(8.125,0.325) P28(8.775,0.325) R1(-8.775,-0.325) R2(-8.125,-0.325) R3(-7.475,-0.325) R4(-6.825,-0.325) R5(-6.175,-0.325) R6(-5.525,-0.325) R7(-4.875,-0.325) R8(-4.225,-0.325) R9(-3.575,-0.325) R10(-2.925,-0.325) R11(-2.275,-0.325) R12(-1.625,-0.325) R13(-0.975,-0.325) R14(-0.325,-0.325) R15(0.325,-0.325) R16(0.975,-0.325) R17(1.625,-0.325) R18(2.275,-0.325) R19(2.925,-0.325) R20(3.575,-0.325) R21(4.225,-0.325) R22(4.875,-0.325) R23(5.525,-0.325) R24(6.175,-0.325) R25(6.825,-0.325) R26(7.475,-0.325) R27(8.125,-0.325) R28(8.775,-0.325) T1(-8.775,-0.975) T2(-8.125,-0.975) T10(-2.925,-0.975) T11(-2.275,-0.975) T12(-1.625,-0.975) T13(-0.975,-0.975) T14(-0.325,-0.975) T15(0.325,-0.975) T16(0.975,-0.975) T17(1.625,-0.975) T18(2.275,-0.975) T19(2.925,-0.975) T27(8.125,-0.975) T28(8.775,-0.975) U1(-8.775,-1.625) U2(-8.125,-1.625) U3(-7.475,-1.625) U4(-6.825,-1.625) U5(-6.175,-1.625) U6(-5.525,-1.625) U7(-4.875,-1.625) U8(-4.225,-1.625) U9(-3.575,-1.625) U10(-2.925,-1.625) U11(-2.275,-1.625) U12(-1.625,-1.625) U13(-0.975,-1.625) U14(-0.325,-1.625) U15(0.325,-1.625) U16(0.975,-1.625) U17(1.625,-1.625) U18(2.275,-1.625) U19(2.925,-1.625) U20(3.575,-1.625) U21(4.225,-1.625) U22(4.875,-1.625) U23(5.525,-1.625) U24(6.175,-1.625) U25(6.825,-1.625) U26(7.475,-1.625) U27(8.125,-1.625) U28(8.775,-1.625) V1(-8.775,-2.275) V2(-8.125,-2.275) V3(-7.475,-2.275) V4(-6.825,-2.275) V5(-6.175,-2.275) V6(-5.525,-2.275) V7(-4.875,-2.275) V8(-4.225,-2.275) V9(-3.575,-2.275) V10(-2.925,-2.275) V11(-2.275,-2.275) V12(-1.625,-2.275) V13(-0.975,-2.275) V14(-0.325,-2.275) V15(0.325,-2.275) V16(0.975,-2.275) V17(1.625,-2.275) V18(2.275,-2.275) V19(2.925,-2.275) V20(3.575,-2.275) V21(4.225,-2.275) V22(4.875,-2.275) V23(5.525,-2.275) V24(6.175,-2.275) V25(6.825,-2.275) V26(7.475,-2.275) V27(8.125,-2.275) V28(8.775,-2.275) W1(-8.775,-2.925) W2(-8.125,-2.925) W10(-2.925,-2.925) W11(-2.275,-2.925) W12(-1.625,-2.925) W13(-0.975,-2.925) W14(-0.325,-2.925) W15(0.325,-2.925) W16(0.975,-2.925) W17(1.625,-2.925) W18(2.275,-2.925) W19(2.925,-2.925) W27(8.125,-2.925) W28(8.775,-2.925) Y1(-8.775,-3.575) Y2(-8.125,-3.575) Y3(-7.475,-3.575) Y4(-6.825,-3.575) Y5(-6.175,-3.575) Y6(-5.525,-3.575) Y7(-4.875,-3.575) Y8(-4.225,-3.575) Y9(-3.575,-3.575) Y11(-2.275,-3.575) Y12(-1.625,-3.575) Y14(-0.325,-3.575) Y15(0.325,-3.575) Y17(1.625,-3.575) Y18(2.275,-3.575) Y20(3.575,-3.575) Y21(4.225,-3.575) Y22(4.875,-3.575) Y23(5.525,-3.575) Y24(6.175,-3.575) Y25(6.825,-3.575) Y26(7.475,-3.575) Y27(8.125,-3.575) Y28(8.775,-3.575)
C0201
  rect 0.25x0.3 smd: 1(-0.275,0) 2(0.275,0)
C0402
  rect 0.55x0.55 smd: 1(-0.45,0) 2(0.45,0)
C0603
  rect 0.8x0.9 smd: 1(-0.7,0) 2(0.7,0)
CRY4_3R20X2R50X0R80
  rect 1.4x1.2 smd: 1(-1.1,-0.85) 2(1.1,-0.85) 3(1.1,0.85) 4(-1.1,0.85)
IND_404026
  rect 1.5x4 smd: 1(-1.5,0) 2(1.5,0)
R0201
  rect 0.25x0.3 smd: 1(-0.275,0) 2(0.275,0)
R0402
  rect 0.55x0.55 smd: 1(-0.45,0) 2(0.45,0)
R0603
  rect 0.65x0.8 smd: 1(-0.725,0) 2(0.725,0)
RP2_0405
  rect 0.5x0.3 smd: 1(-0.625,-0.275) 2(0.625,-0.275) 3(-0.625,0.275) 4(0.625,0.275)
SOT_23_5
  oval 1.1x0.6 smd: 1(0,0)
  rect 1.1x0.6 smd: 2(0,-1) 3(0,-2) 4(2.8,-2) 5(2.8,0)
TP_0R70
  round 0.7 smd: 1(0,0)
unnamed
  rect 0.55x0.55 smd: 1(-0.45,0) 2(0.45,0)

## Nets
GND: C1000.2 C1001.2 C1002.2 C1003.2 C1004.2 C1005.2 C1006.2 C1007.2 C1008.2 C1009.2 C1010.2 C1011.2 C1012.2 C1013.2 C1014.2 C1015.2 C1016.2 C1017.2 C1018.2 C1019.2 C1020.2 C1100.2 C1101.2 C1102.2 C1103.2 C1104.2 C1105.2 C1106.2 C1107.2 C1108.2 C1109.2 C1200.2 C1201.2 C1202.2 C1203.2 C1204.2 C1205.2 C1206.2 C1207.2 C1208.2 C1209.2 C1210.2 C1211.2 C1212.2 C1213.2 C1214.2 C1300.2 C1301.2 C1400.2 C1401.2 C1402.2 C1403.2 C1404.2 C1405.2 C1406.2 C1407.2 C1408.2 C1409.2 C1410.2 C1411.2 C1412.2 C1413.2 C1414.2 C1500.2 C1501.2 C1502.2 C1503.2 C1504.2 C1505.2 C1506.2 C1507.2 C1508.2 C1509.2 C1510.2 C1511.2 C1600.2 C1601.2 C1602.2 C1603.2 C1700.2 C1701.2 C1702.2 C1703.2 C1712.2 C1713.2 C1714.2 C1715.2 C1716.2 C1717.2 C1718.2 C1719.2 C1720.2 C1800.2 C1900.2 C3800.2 C3801.2 C3802.2 C3803.2 C3804.2 C3805.2 C3806.2 C3807.2 C3808.2 C3809.2 C3810.2 C3811.2 C3812.2 C3813.2 C3814.2 C3815.2 C3816.2 C3817.2 C3818.2 C3819.2 C3820.2 C3821.2 C3822.2 C3823.2 C3824.2 C3825.2 C3826.2 C3827.2 C3828.2 C3829.2 C3830.2 C3831.2 C3832.2 C3833.2 C3834.2 C3835.2 C3836.2 C3837.2 C3838.2 C3839.2 C3840.2 C3841.2 C3842.2 C3843.2 C3844.2 C3845.2 C3846.2 C3847.2 C3848.2 C3849.2 C3850.2 C3851.2 C3852.2 C3853.2 C3854.2 C3855.2 C3856.2 C3858.2 C3859.2 C3860.2 R1400.2 R1708.2 R3809.2 TP1301.1 TP1303.1 TP1502.1 U1000.A1(VSS_1) U1000.A3(VSS_2) U1000.A6(VSS_3) U1000.A10(VSS_4) U1000.A14(VSS_5) U1000.A18(VSS_6) U1000.A28(VSS_7) U1000.AA4(VSS_133) U1000.AA9(VSS_134) U1000.AA12(AVSS_24) U1000.AA14(AVSS_25) U1000.AA15(AVSS_26) U1000.AA17(AVSS_27) U1000.AA23(VSS_135) U1000.AA24(AVSS_28) U1000.AA26(AVSS_29) U1000.AB2(VSS_136) U1000.AB6(VSS_137) U1000.AB11(AVSS_30) U1000.AB12(AVSS_31) U1000.AB14(AVSS_32) U1000.AB15(AVSS_33) U1000.AB17(AVSS_34) U1000.AB24(TVSS) U1000.AC9(AVSS_35) U1000.AC11(AVSS_36) U1000.AC12(AVSS_37) U1000.AC15(AVSS_38) U1000.AC18(AVSS_39) U1000.AC25(AVSS_40) U1000.AC26(AVSS_41) U1000.AD3(VSS_138) U1000.AD26(AVSS_42) U1000.AE6(VSS_139) U1000.AE14(AVSS_43) U1000.AE17(AVSS_44) U1000.AE20(AVSS_45) U1000.AE21(VSS_140) U1000.AE27(AVSS_46) U1000.AE28(AVSS_47) U1000.AF3(VSS_141) U1000.AF9(AVSS_48) U1000.AF11(AVSS_49) U1000.AF12(AVSS_50) U1000.AF14(AVSS_51) U1000.AF15(AVSS_52) U1000.AF17(AVSS_53) U1000.AF18(AVSS_54) U1000.AF20(AVSS_55) U1000.AF21(AVSS_56) U1000.AF26(VSS_142) U1000.AG5(VSS_143) U1000.AG18(AVSS_57) U1000.AH1(VSS_144) U1000.AH8(VSS_145) U1000.AH18(AVSS_58) U1000.AH23(AVSS_59) U1000.AH28(VSS_146) U1000.B5(VSS_8) U1000.B9(VSS_9) U1000.B12(VSS_10) U1000.B16(VSS_11) U1000.B23(VSS_12) U1000.B26(VSS_13) U1000.C3(VSS_14) U1000.C6(VSS_15) U1000.C8(VSS_16) U1000.C9(VSS_17) U1000.C11(VSS_18) U1000.C12(VSS_19) U1000.C14(VSS_20) U1000.C15(VSS_21) U1000.C17(VSS_22) U1000.C18(VSS_23) U1000.C25(VSS_24) U1000.D2(VSS_25) U1000.D3(VSS_26) U1000.D11(VSS_27) U1000.D28(VSS_28) U1000.E3(VSS_29) U1000.E7(VSS_30) U1000.F1(VSS_31) U1000.F3(VSS_32) U1000.F9(VSS_33) U1000.F12(VSS_34) U1000.F14(VSS_35) U1000.F15(VSS_36) U1000.F17(VSS_37) U1000.G5(VSS_38) U1000.G6(VSS_39) U1000.G8(VSS_40) U1000.G9(VSS_41) U1000.G11(VSS_42) U1000.G12(VSS_43) U1000.G14(VSS_44) U1000.G15(VSS_45) U1000.G17(VSS_46) U1000.G18(VSS_47) U1000.G24(VSS_48) U1000.H2(VSS_49) U1000.H3(VSS_50) U1000.H6(VSS_51) U1000.J3(VSS_52) U1000.J5(VSS_53) U1000.J8(DDR_AVSS) U1000.J17(VSS_54) U1000.J18(VSS_55) U1000.J20(VSS_56) U1000.J22(VSS_57) U1000.J26(VSS_58) U1000.J27(AVSS_1) U1000.K1(VSS_59) U1000.K11(VSS_60) U1000.K12(VSS_61) U1000.K13(VSS_62) U1000.K14(VSS_63) U1000.K19(VSS_64) U1000.L3(VSS_65) U1000.L5(VSS_66) U1000.L8(VSS_67) U1000.L11(VSS_68) U1000.L13(VSS_69) U1000.L14(VSS_70) U1000.L19(VSS_71) U1000.L20(VSS_72) U1000.L21(VSS_73) U1000.L24(AVSS_2) U1000.L26(AVSS_3) U1000.M2(VSS_74) U1000.M3(VSS_75) U1000.M6(VSS_76) U1000.M8(VSS_77) U1000.M11(VSS_78) U1000.M13(VSS_79) U1000.M14(VSS_80) U1000.M16(VSS_81) U1000.M18(VSS_82) U1000.M21(AVSS_4) U1000.M26(AVSS_5) U1000.N1(VSS_83) U1000.N11(SYSPLL_AVSS) U1000.N12(VSS_84) U1000.N14(VSS_85) U1000.N15(VSS_86) U1000.N17(VSS_87) U1000.N18(VSS_88) U1000.N28(AVSS_6) U1000.P3(VSS_89) U1000.P6(VSS_90) U1000.P12(VSS_91) U1000.P14(VSS_92) U1000.P15(VSS_93) U1000.P17(VSS_94) U1000.P21(AVSS_7) U1000.P26(AVSS_8) U1000.R3(VSS_95) U1000.R6(VSS_96) U1000.R10(VSS_97) U1000.R11(VSS_98) U1000.R14(VSS_99) U1000.R15(VSS_100) U1000.R17(VSS_101) U1000.R18(VSS_102) U1000.R19(VSS_103) U1000.R23(AVSS_9) U1000.R26(AVSS_10) U1000.T10(VSS_104) U1000.T11(VSS_105) U1000.T14(VSS_106) U1000.T15(VSS_107) U1000.T17(VSS_108) U1000.T18(VSS_109) U1000.T19(VSS_110) U1000.U1(VSS_111) U1000.U6(VSS_112) U1000.U7(VSS_113) U1000.U8(VSS_114) U1000.U10(VSS_115) U1000.U14(VSS_116) U1000.U15(VSS_117) U1000.U16(VSS_118) U1000.U17(VSS_119) U1000.U18(VSS_120) U1000.U23(AVSS_11) U1000.U26(AVSS_12) U1000.V3(VSS_121) U1000.V8(VSS_122) U1000.V9(VSS_123) U1000.V13(VSS_124) U1000.V14(AVSS_13) U1000.V15(AVSS_14) U1000.V16(AVSS_15) U1000.V20(PMUPLL_AVSS) U1000.V22(AVSS_16) U1000.V23(AVSS_17) U1000.V26(AVSS_18) U1000.W10(VSS_125) U1000.W11(VSS_126) U1000.W12(VSS_127) U1000.W13(VSS_128) U1000.W17(AVSS_19) U1000.Y8(VSS_129) U1000.Y9(VSS_130) U1000.Y11(VSS_131) U1000.Y12(VSS_132) U1000.Y18(AVSS_20) U1000.Y23(AVSS_21) U1000.Y24(AVSS_22) U1000.Y26(AVSS_23) U3800.A3(VSS_1) U3800.A10(VSS_2) U3800.AB3(VSS_55) U3800.AB5(VSS_56) U3800.AB8(VSS_57) U3800.AB10(VSS_58) U3800.C1(VSS_3) U3800.C5(VSS_4) U3800.C8(VSS_5) U3800.C12(VSS_6) U3800.D2(VSS_7) U3800.D4(VSS_8) U3800.D9(VSS_9) U3800.D11(VSS_10) U3800.E1(VSS_11) U3800.E5(VSS_12) U3800.E8(VSS_13) U3800.E12(VSS_14) U3800.G1(VSS_15) U3800.G3(VSS_16) U3800.G5(VSS_17) U3800.G8(VSS_18) U3800.G10(VSS_19) U3800.G12(VSS_20) U3800.J1(VSS_21) U3800.J3(VSS_22) U3800.J10(VSS_23) U3800.J12(VSS_24) U3800.K2(VSS_25) U3800.K4(VSS_26) U3800.K9(VSS_27) U3800.K11(VSS_28) U3800.N2(VSS_29) U3800.N4(VSS_30) U3800.N9(VSS_31) U3800.N11(VSS_32) U3800.P1(VSS_33) U3800.P3(VSS_34) U3800.P10(VSS_35) U3800.P12(VSS_36) U3800.T1(VSS_37) U3800.T3(VSS_38) U3800.T5(VSS_39) U3800.T8(VSS_40) U3800.T10(VSS_41) U3800.T12(VSS_42) U3800.V1(VSS_43) U3800.V5(VSS_44) U3800.V8(VSS_45) U3800.V12(VSS_46) U3800.W2(VSS_47) U3800.W4(VSS_48) U3800.W9(VSS_49) U3800.W11(VSS_50) U3800.Y1(VSS_51) U3800.Y5(VSS_52) U3800.Y8(VSS_53) U3800.Y12(VSS_54) U3801.2(GND) U3802.2(GND) Y1200.2(GND#2) Y1200.4(GND#4)
VCC0V6_DDR: C1105.1 C1106.1 C1107.1 C1108.1 C1109.1 C3828.1 C3829.1 C3830.1 C3831.1 C3832.1 C3833.1 C3834.1 C3835.1 C3836.1 C3837.1 C3838.1 C3839.1 C3840.1 C3841.1 C3842.1 C3843.1 C3844.1 C3845.1 C3846.1 C3854.1 C3857.1 C3858.1 C3859.1 C3860.1 L3800.2 R3800.1 R3801.1 R3804.1 R3807.1 U1000.J11(DDRPHY_VDDQL_1) U1000.J12(DDRPHY_VDDQL_2) U1000.J14(DDRPHY_VDDQL_3) U1000.K10(DDRPHY_VDDQL_4) U1000.L10(DDRPHY_VDDQL_5) U1000.M10(DDRPHY_VDDQL_6) U3800.AA3(VDDQ_17) U3800.AA5(VDDQ_18) U3800.AA8(VDDQ_19) U3800.AA10(VDDQ_20) U3800.B3(VDDQ_1) U3800.B5(VDDQ_2) U3800.B8(VDDQ_3) U3800.B10(VDDQ_4) U3800.D1(VDDQ_5) U3800.D5(VDDQ_6) U3800.D8(VDDQ_7) U3800.D12(VDDQ_8) U3800.F3(VDDQ_9) U3800.F10(VDDQ_10) U3800.U3(VDDQ_11) U3800.U10(VDDQ_12) U3800.W1(VDDQ_13) U3800.W5(VDDQ_14) U3800.W8(VDDQ_15) U3800.W12(VDDQ_16)
VCC1V8_DDR: C3823.1 C3824.1 C3825.1 C3826.1 C3847.1 C3848.1 C3849.1 C3850.1 C3851.1 R3802.2 R3806.1 U3800.F1(VDD1_1) U3800.F12(VDD1_2) U3800.G4(VDD1_3) U3800.G9(VDD1_4) U3800.T4(VDD1_5) U3800.T9(VDD1_6) U3800.U1(VDD1_7) U3800.U12(VDD1_8) U3802.5(OUT)
VCC3V3_PMU: C1203.1 C1210.1 R1204.1 R1205.1 R1206.1 R1207.1 R3808.1 U1000.W19(PMUIO2) U1000.Y20(PMUIO1)
VCC3V3_SYS: C3827.1 C3855.1 U3801.4(VIN) U3802.1(IN)
VCC_1V8: C1511.1 R1509.2 R1610.2 U1000.H20(OTP_VCC18)
VCC_3V3: C1401.1 C1404.1 C1509.1 C1800.1 R1511.2 R1611.2 R1800.1 R1801.1 R1804.1 R1805.1 U1000.M23(USB3_AVDD_3V3) U1000.P10(USB2_AVDD_3V3) U1000.V10(VCCIO5_1) U1000.V11(VCCIO5_2) U1000.V12(VCCIO7)
VCC_DDR: C1100.1 C1101.1 C1102.1 C1103.1 C1104.1 C3801.1 C3802.1 C3803.1 C3804.1 C3805.1 C3806.1 C3807.1 C3808.1 C3809.1 C3810.1 C3811.1 C3812.1 C3813.1 C3814.1 C3815.1 C3816.1 C3817.1 C3818.1 C3819.1 C3820.1 C3821.1 C3822.1 R1101.2 R3804.2 U1000.H9(DDRPHY_VDDQ_1) U1000.H11(DDRPHY_VDDQ_2) U1000.H12(DDRPHY_VDDQ_3) U1000.H14(DDRPHY_VDDQ_4) U1000.H15(DDRPHY_VDDQ_5) U1000.J9(DDRPHY_VDDQ_6) U1000.L9(DDRPHY_VDDQ_7) U1000.M9(DDRPHY_VDDQ_8) U3800.A4(VDD2_1) U3800.A9(VDD2_2) U3800.AB4(VDD2_23) U3800.AB9(VDD2_24) U3800.F5(VDD2_3) U3800.F8(VDD2_4) U3800.H1(VDD2_5) U3800.H5(VDD2_6) U3800.H8(VDD2_7) U3800.H12(VDD2_8) U3800.K1(VDD2_9) U3800.K3(VDD2_10) U3800.K10(VDD2_11) U3800.K12(VDD2_12) U3800.N1(VDD2_13) U3800.N3(VDD2_14) U3800.N10(VDD2_15) U3800.N12(VDD2_16) U3800.R1(VDD2_17) U3800.R5(VDD2_18) U3800.R8(VDD2_19) U3800.R12(VDD2_20) U3800.U5(VDD2_21) U3800.U8(VDD2_22)
VCCA1V8_IMAGE: C1713.1 C1715.1 C1717.1 C1720.1 U1000.M22(EDP_TX_AVDD_1V8) U1000.W18(HDMI_TX_AVDD_1V8)
VCCA1V8_PMU: C1206.1 C1207.1 R3802.1 U1000.Y21(PMUPLL_AVDD_1V8)
VCCA_1V8: C1211.1 C1212.1 C1407.1 C1410.1 C1411.1 C1414.1 C1510.1 R1512.1 U1000.H22(SARADC_AVDD_1V8) U1000.N10(SYSPLL_AVDD_1V8) U1000.R22(MULTI_PHY_AVDD_1V8) U1000.U22(PCIE30_AVDD_1V8)
VCCIO4: C1500.1 R1509.1 R1510.1 R1511.1 U1000.J21(VCCIO4)
VCCIO6: C1602.1 C1603.1 R1606.1 R1607.1 R1610.1 R1611.1 U1000.R9(VCCIO6_1) U1000.U9(VCCIO6_2)
VCCIO_ACODEC: C1900.1 R1900.1 R1901.1 U1000.H17(VCCIO1)
VCCIO_FLASH: C1300.1 U1000.H18(VCCIO2)
VCCIO_SD: C1301.1 U1000.L22(VCCIO3)
VCCIO_WL: R1510.2
VDD_CPU: C1000.1 C1001.1 C1002.1 C1003.1 C1004.1 U1000.J15(VDD_CPU_1) U1000.K15(VDD_CPU_2) U1000.K16(VDD_CPU_3) U1000.K17(VDD_CPU_4) U1000.K18(VDD_CPU_5) U1000.L15(VDD_CPU_6) U1000.L16(VDD_CPU_7) U1000.L17(VDD_CPU_8) U1000.L18(VDD_CPU_9) U1000.M17(VDD_CPU_10)
VDD_CPU_COM: U1000.M15(VDD_CPU_COM)
VDD_GPU: C1012.1 C1013.1 C1014.1 C1015.1 C1016.1 U1000.R13(VDD_GPU_1) U1000.T13(VDD_GPU_2) U1000.U11(VDD_GPU_3) U1000.U12(VDD_GPU_4) U1000.U13(VDD_GPU_5)
VDD_LOGIC: C1005.1 C1006.1 C1007.1 C1008.1 C1009.1 C1010.1 C1011.1 U1000.L12(VDD_LOGIC_1) U1000.M12(VDD_LOGIC_2) U1000.N13(VDD_LOGIC_3) U1000.N16(VDD_LOGIC_4) U1000.P13(VDD_LOGIC_5) U1000.P16(VDD_LOGIC_6) U1000.R12(VDD_LOGIC_7) U1000.R16(VDD_LOGIC_8) U1000.T12(VDD_LOGIC_9) U1000.T16(VDD_LOGIC_10)
VDD_NPU: C1017.1 C1018.1 C1019.1 C1020.1 U1000.M19(VDD_NPU_1) U1000.N19(VDD_NPU_2) U1000.P18(VDD_NPU_3) U1000.P19(VDD_NPU_4) U1000.P20(VDD_NPU_5)
VDDA0V9_IMAGE: C1714.1 C1716.1 C1718.1 C1719.1 U1000.M20(EDP_TX_AVDD_0V9) U1000.V17(HDMI_TX_AVDD_0V9_1) U1000.V18(HDMI_TX_AVDD_0V9_2)
VDDA0V9_PMU: C1204.1 C1205.1 C1213.1 C1214.1 U1000.V19(PMU_VDD_LOGIC_0V9) U1000.V21(PMUPLL_AVDD_0V9)
VDDA_0V9: C1208.1 C1209.1 C1408.1 C1409.1 C1412.1 C1413.1 U1000.P11(SYSPLL_AVDD_0V9) U1000.R20(MULTI_PHY_AVDD_0V9_1) U1000.R21(MULTI_PHY_AVDD_0V9_2) U1000.U20(PCIE30_AVDD_0V9_2) U1000.U21(PCIE30_AVDD_0V9_1)
4G_DISABLE_GPIO4_C2: U1000.AF8(GPIO4_C2_D)
4G_PWREN_H_GPIO0_C6: U1000.AD20(GPIO0_C6_D)
BT_REG_ON_H_GPIO2_B7: U1000.H25(GPIO2_B7_D)
BT_WAKE_HOST_H_GPIO2_C0: U1000.F24(GPIO2_C0_D)
CAN0_RX_M1: R1304.1 U1000.H28(GPIO2_A2_D)
CAN0_TX_M1: U1000.H27(GPIO2_A1_U)
CIF_CLKOUT: R1609.2
CIF_CLKOUT_SOC: R1609.1 U1000.U3(GPIO4_C0_D)
CLK32K_OUT1_WIFI: R1508.2
DDR_RZQ: R1101.1 U1000.H7(DDR_RZQ)
DVP_PWREN0_H_GPIO0_B0: U1000.AD23(GPIO0_B0_U)
EDP_TX_AUXN: U1000.M25(EDP_TX_AUXN)
EDP_TX_AUXP: U1000.L25(EDP_TX_AUXP)
EDP_TX_D0N: C1705.2
EDP_TX_D0P: C1704.2
EDP_TX_D1N: C1709.2
EDP_TX_D1P: C1706.2
EDP_TX_D2N: C1708.2
EDP_TX_D2P: C1707.2
EDP_TX_D3N: C1711.2
EDP_TX_D3P: C1710.2
EDP_TXD0N: C1705.1 U1000.K27(EDP_TX_D0N)
EDP_TXD0P: C1704.1 U1000.J28(EDP_TX_D0P)
EDP_TXD1N: C1709.1 U1000.L27(EDP_TX_D1N)
EDP_TXD1P: C1706.1 U1000.K28(EDP_TX_D1P)
EDP_TXD2N: C1708.1 U1000.M27(EDP_TX_D2N)
EDP_TXD2P: C1707.1 U1000.L28(EDP_TX_D2P)
EDP_TXD3N: C1711.1 U1000.N27(EDP_TX_D3N)
EDP_TXD3P: C1710.1 U1000.M28(EDP_TX_D3P)
EMMC_CLKOUT/FLASH_DQS: R1300.2
EMMC_CLKOUT/FLASH_DQS_SOC: R1300.1 U1000.A23(GPIO1_C5_D)
EMMC_CMD/FLASH_WRN: U1000.B22(GPIO1_C4_U)
EMMC_D0/FLASH_D0: TP1300.1 U1000.A24(GPIO1_B4_U)
EMMC_D1/FLASH_D1: U1000.C21(GPIO1_B5_U)
EMMC_D2/FLASH_D2: U1000.B24(GPIO1_B6_U)
EMMC_D3/FLASH_D3: U1000.D21(GPIO1_B7_U)
EMMC_D4/FLASH_D4: U1000.A25(GPIO1_C0_U)
EMMC_D5/FLASH_D5: U1000.E21(GPIO1_C1_U)
EMMC_D6/FLASH_D6: U1000.E22(GPIO1_C2_U)
EMMC_D7/FLASH_D7: U1000.B25(GPIO1_C3_U)
EMMC_DATA_STROBE/FLASH_CLE: U1000.A26(GPIO1_C6_D)
EMMC_RSTN/FSPI_D2/FLASH_WPN: U1000.F20(GPIO1_C7_D)
ETH0_REFCLKO_25M: R1507.2
ETH1_REFCLKO_25M_M1: R1608.2
ETH1_REFCLKO_25M_M1_SOC: R1608.1 U1000.V1(GPIO4_B3_D)
FLASH_VOL_SEL: U1000.AG25(GPIO0_A7_U)
FSPI_CLK/FLASH_ALE: R1301.2 TP1302.1
FSPI_CLK/FLASH_ALE_SOC: R1301.1 U1000.A22(GPIO1_D0_D)
FSPI_CS0N/FLASH_CS0N: U1000.C23(GPIO1_D3_U)
FSPI_D0/FLASH_RDY: U1000.C24(GPIO1_D1_U)
FSPI_D1/FLASH_RDN: U1000.D23(GPIO1_D2_U)
FSPI_D3/FLASH_CS1N: U1000.A27(GPIO1_D4_U)
GMAC0_INT/PMEB_GPIO3_C0: R1800.2 U1000.AD2(GPIO3_C0_D)
GMAC0_MCLKINOUT: U1000.F25(GPIO2_C2_D)
GMAC0_MDC: U1000.H24(GPIO2_C3_D)
GMAC0_MDIO: U1000.H23(GPIO2_C4_D)
GMAC0_RSTN_GPIO3_B7: U1000.AD4(GPIO3_B7_D)
GMAC0_RXCLK: U1000.B28(GPIO2_A5_U)
GMAC0_RXD0: U1000.F27(GPIO2_B6_U)
GMAC0_RXD2: U1000.E27(GPIO2_A3_U)
GMAC0_RXD3: U1000.E28(GPIO2_A4_U)
GMAC0_TXCLK: R1503.2
GMAC0_TXD0: R1504.2
GMAC0_TXD1: R1505.2
GMAC0_TXD2: R1500.2
GMAC0_TXD3: R1501.2
GMAC0_TXEN: R1506.2
GMAC1_INT/PMEB_GPIO3_A7: R1801.2 U1000.AH2(GPIO3_A7_D)
GMAC1_MCLKINOUT_M1: U1000.U2(GPIO4_C1_D)
GMAC1_MDC_M1: U1000.U5(GPIO4_B6_D)
GMAC1_MDIO_M1: U1000.U4(GPIO4_B7_D)
GMAC1_RSTN_GPIO3_B0: U1000.AG2(GPIO3_B0_D)
GMAC1_RXCLK_M1: U1000.Y3(GPIO4_A3_D)
GMAC1_RXD0_M1: U1000.W1(GPIO4_A7_D)
GMAC1_RXD1_M1: U1000.V7(GPIO4_B0_D)
GMAC1_RXD2_M1: U1000.AA2(GPIO4_A1_D)
GMAC1_RXD3_M1: U1000.Y4(GPIO4_A2_D)
GMAC1_RXDV_CRS_M1: U1000.V2(GPIO4_B1_D)
GMAC1_RXER_M1/GPIO4_B2: TP1600.1 U1000.V4(GPIO4_B2_D)
GMAC1_TXCLK_M1: R1602.2
GMAC1_TXCLK_M1_SOC: R1602.1 U1000.AA3(GPIO4_A0_D)
GMAC1_TXD0_M1: R1603.2
GMAC1_TXD0_M1_SOC: R1603.1 U1000.Y2(GPIO4_A4_D)
GMAC1_TXD1_M1: R1604.2
GMAC1_TXD1_M1_SOC: R1604.1 U1000.Y1(GPIO4_A5_D)
GMAC1_TXD2_M1: R1600.2
GMAC1_TXD2_M1_SOC: R1600.1 U1000.Y6(GPIO3_D6_D)
GMAC1_TXD3_M1: R1601.2
GMAC1_TXD3_M1_SOC: R1601.1 U1000.Y5(GPIO3_D7_D)
GMAC1_TXEN_M1: R1605.2
GMAC1_TXEN_M1_SOC: R1605.1 U1000.W2(GPIO4_A6_D)
GPIO2_B0: R1502.1 R1503.1 U1000.D27(GPIO2_B0_D)
GPIO2_C6: R1508.1 U1000.E26(GPIO2_C6_D)
HDMI_TX0N: R1705.1 U1000.AH20(HDMI_TX_D0N)
HDMI_TX0N_PORT: R1705.2
HDMI_TX0P: R1704.1 U1000.AG20(HDMI_TX_D0P)
HDMI_TX0P_PORT: R1704.2
HDMI_TX1N: R1701.1 U1000.AH21(HDMI_TX_D1N)
HDMI_TX1N_PORT: R1701.2
HDMI_TX1P: R1700.1 U1000.AG21(HDMI_TX_D1P)
HDMI_TX1P_PORT: R1700.2
HDMI_TX2N: R1703.1 U1000.AH22(HDMI_TX_D2N)
HDMI_TX2N_PORT: R1703.2
HDMI_TX2P: R1702.1 U1000.AG22(HDMI_TX_D2P)
HDMI_TX2P_PORT: R1702.2
HDMI_TX_HPDIN: C1712.1 U1000.AB18(HDMI_TX_HPDIN)
HDMI_TX_REXT: R1708.1 U1000.AA18(HDMI_TX_REXT)
HDMI_TXCLKN: L1700.4 R1707.1 U1000.AG19(HDMI_TX_CLKN)
HDMI_TXCLKN_PORT: L1700.3 R1707.2
HDMI_TXCLKP: L1700.2 R1706.1 U1000.AH19(HDMI_TX_CLKP)
HDMI_TXCLKP_PORT: L1700.1 R1706.2
HDMIRX_DET_L_GPIO3_D0: U1000.AB5(GPIO3_D0_D)
HDMIRX_INT_L_GPIO4_C3: U1000.AA11(GPIO4_C3_D)
HDMIRX_PWREN_H_GPIO0_D6: U1000.AC24(GPIO0_D6_D)
HDMIRX_RST_L_GPIO4_D2: U1000.AB9(GPIO4_D2_D)
HDMITX_CEC_M0: U1000.AH6(GPIO4_D1_U)
HDMITX_SCL: U1000.AG8(GPIO4_C7_U)
HDMITX_SDA: U1000.AG7(GPIO4_D0_U)
HOST_WAKE_BT_H_GPIO2_C1: R1507.1 U1000.G23(GPIO2_C1_D)
HP_DET_L_GPIO3_C2: U1000.AA7(GPIO3_C2_D)
I2C0_SCL_PMIC: R1204.2 U1000.AF24(GPIO0_B1_U)
I2C0_SDA_PMIC: R1205.2 U1000.AB21(GPIO0_B2_U)
I2C1_SCL_TP: R1206.2 U1000.AG24(GPIO0_B3_U)
I2C1_SDA_TP: R1207.2 U1000.AB20(GPIO0_B4_U)
I2C2_SCL_M1: R1607.2 U1000.V5(GPIO4_B5_D)
I2C2_SDA_M1: R1606.2 U1000.V6(GPIO4_B4_D)
I2C3_SCL_M0: R1901.2 U1000.E18(GPIO1_A1_U)
I2C3_SDA_M0: R1900.2 U1000.D18(GPIO1_A0_U)
I2C5_SCL_M0: R1804.2 U1000.AF1(GPIO3_B3_D)
I2C5_SDA_M0: R1805.2 U1000.AE1(GPIO3_B4_D)
I2S1_LRCK_TX_M0_RK809: R1905.2
I2S1_LRCK_TX_M0_SOC: R1905.1 U1000.A20(GPIO1_A5_D)
I2S1_MCLK_M0_RK809: R1902.2
I2S1_MCLK_M0_SOC: R1902.1 U1000.A19(GPIO1_A2_D)
I2S1_SCLK_TX_M0_RK809: R1903.2
I2S1_SCLK_TX_M0_SOC: R1903.1 U1000.B19(GPIO1_A3_D)
I2S1_SDI0_M0/PDM_SDI0_M0_RK809: U1000.B21(GPIO1_B3_D)
I2S1_SDO0_M0_RK809: U1000.B20(GPIO1_A7_D)
I2S3_LRCK_M0: R1803.2
I2S3_LRCK_M0_SOC: R1803.1 U1000.AF4(GPIO3_A4_D)
I2S3_MCLK_M0: TP1800.1 U1000.AE5(GPIO3_A2_D)
I2S3_SCLK_M0: R1802.2
I2S3_SCLK_M0_SOC: R1802.1 U1000.AG4(GPIO3_A3_D)
I2S3_SDI_M0: U1000.AG3(GPIO3_A6_D)
I2S3_SDO_M0: TP1801.1 U1000.AH3(GPIO3_A5_D)
LCD0_BL_PWM4: U1000.AE23(GPIO0_C3_D)
LCD0_PWREN_H_GPIO0_C7: U1000.AH25(GPIO0_C7_D)
LCD1_BL_PWM5: U1000.AD21(GPIO0_C4_D)
LCD1_PWREN_H_GPIO0_C5: U1000.AC21(GPIO0_C5_D)
LCD_EN_H_GPIO3_C6: U1000.AC5(GPIO3_C6_D)
LCD_RST_L_GPIO3_C7: U1000.AA6(GPIO3_C7_D)
LPDDR4_A0_A: U1000.C2(AC11) U3800.H2(CA0_A)
LPDDR4_A0_B: U1000.B8(AC13) U3800.R2(CA0_B)
LPDDR4_A1_A: U1000.B1(AC2) U3800.J2(CA1_A)
LPDDR4_A1_B: U1000.A7(AC6) U3800.P2(CA1_B)
LPDDR4_A2_A: U1000.E4(AC15) U3800.H9(CA2_A)
LPDDR4_A2_B: U1000.E11(AC18) U3800.R9(CA2_B)
LPDDR4_A3_A: U1000.C4(AC12) U3800.H10(CA3_A)
LPDDR4_A3_B: U1000.D9(AC4) U3800.R10(CA3_B)
LPDDR4_A4_A: U1000.C5(AC14) U3800.H11(CA4_A)
LPDDR4_A4_B: U1000.E9(AC19) U3800.R11(CA4_B)
LPDDR4_A5_A: U1000.D5(AC16) U3800.J11(CA5_A)
LPDDR4_A5_B: U1000.B7(AC5) U3800.P11(CA5_B)
LPDDR4_CKE0_A: U1000.B3(AC22) U3800.J4(CKE0_A)
LPDDR4_CKE0_B: U1000.D6(AC10) U3800.P4(CKE0_B)
LPDDR4_CKE1_A: U1000.F4(AC3) U3800.J5(CKE1_A)
LPDDR4_CKE1_B: U1000.E6(AC17) U3800.P5(CKE1_B)
LPDDR4_CLKN_A: U1000.A4(AC24) U3800.J9(CK_C_A)
LPDDR4_CLKN_B: U1000.A5(AC9) U3800.P9(CK_C_B)
LPDDR4_CLKP_A: U1000.B4(AC23) U3800.J8(CK_T_A)
LPDDR4_CLKP_B: U1000.B6(AC0) U3800.P8(CK_T_B)
LPDDR4_CS0N_A: U1000.A2(AC25) U3800.H4(CS0_A)
LPDDR4_CS0N_B: U1000.D8(AC28) U3800.R4(CS0_B)
LPDDR4_CS1N_A: U1000.B2(AC26) U3800.H3(CS1_A)
LPDDR4_CS1N_B: U1000.E8(AC27) U3800.R3(CS1_B)
LPDDR4_DM0_A: U1000.H5(DDR_DM0_A) U3800.C3(DMI0_A)
LPDDR4_DM0_B: U1000.D14(DDR_DM0_B) U3800.Y3(DMI0_B)
LPDDR4_DM1_A: U1000.J4(DDR_DM1_A) U3800.C10(DMI1_A)
LPDDR4_DM1_B: U1000.E17(DDR_DM1_B) U3800.Y10(DMI1_B)
LPDDR4_DQ0_A: U1000.F2(DDR_DQ0_A) U3800.B2(DQ0_A)
LPDDR4_DQ0_B: U1000.B10(DDR_DQ0_B) U3800.AA2(DQ0_B)
LPDDR4_DQ1_A: U1000.E1(DDR_DQ1_A) U3800.C2(DQ1_A)
LPDDR4_DQ1_B: U1000.A9(DDR_DQ1_B) U3800.Y2(DQ1_B)
LPDDR4_DQ2_A: U1000.E2(DDR_DQ2_A) U3800.E2(DQ2_A)
LPDDR4_DQ2_B: U1000.D12(DDR_DQ2_B) U3800.V2(DQ2_B)
LPDDR4_DQ3_A: U1000.D1(DDR_DQ3_A) U3800.F2(DQ3_A)
LPDDR4_DQ3_B: U1000.E12(DDR_DQ3_B) U3800.U2(DQ3_B)
LPDDR4_DQ4_A: U1000.J1(DDR_DQ4_A) U3800.F4(DQ4_A)
LPDDR4_DQ4_B: U1000.A12(DDR_DQ4_B) U3800.U4(DQ4_B)
LPDDR4_DQ5_A: U1000.J2(DDR_DQ5_A) U3800.E4(DQ5_A)
LPDDR4_DQ5_B: U1000.D15(DDR_DQ5_B) U3800.V4(DQ5_B)
LPDDR4_DQ6_A: U1000.H1(DDR_DQ6_A) U3800.C4(DQ6_A)
LPDDR4_DQ6_B: U1000.E15(DDR_DQ6_B) U3800.Y4(DQ6_B)
LPDDR4_DQ7_A: U1000.H4(DDR_DQ7_A) U3800.B4(DQ7_A)
LPDDR4_DQ7_B: U1000.E14(DDR_DQ7_B) U3800.AA4(DQ7_B)
LPDDR4_DQ8_A: U1000.M1(DDR_DQ8_A) U3800.B11(DQ8_A)
LPDDR4_DQ8_B: U1000.A16(DDR_DQ8_B) U3800.AA11(DQ8_B)
LPDDR4_DQ9_A: U1000.N2(DDR_DQ9_A) U3800.C11(DQ9_A)
LPDDR4_DQ9_B: U1000.B17(DDR_DQ9_B) U3800.Y11(DQ9_B)
LPDDR4_DQ10_A: U1000.L7(DDR_DQ10_A) U3800.E11(DQ10_A)
LPDDR4_DQ10_B: U1000.A17(DDR_DQ10_B) U3800.V11(DQ10_B)
LPDDR4_DQ11_A: U1000.L6(DDR_DQ11_A) U3800.F11(DQ11_A)
LPDDR4_DQ11_B: U1000.B18(DDR_DQ11_B) U3800.U11(DQ11_B)
LPDDR4_DQ12_A: U1000.K2(DDR_DQ12_A) U3800.F9(DQ12_A)
LPDDR4_DQ12_B: U1000.B13(DDR_DQ12_B) U3800.U9(DQ12_B)
LPDDR4_DQ13_A: U1000.J6(DDR_DQ13_A) U3800.E9(DQ13_A)
LPDDR4_DQ13_B: U1000.A13(DDR_DQ13_B) U3800.V9(DQ13_B)
LPDDR4_DQ14_A: U1000.J7(DDR_DQ14_A) U3800.C9(DQ14_A)
LPDDR4_DQ14_B: U1000.D17(DDR_DQ14_B) U3800.Y9(DQ14_B)
LPDDR4_DQ15_A: U1000.L4(DDR_DQ15_A) U3800.B9(DQ15_A)
LPDDR4_DQ15_B: U1000.B14(DDR_DQ15_B) U3800.AA9(DQ15_B)
LPDDR4_DQS0N_A: U1000.G2(DDR_DQS0N_A) U3800.E3(DQS0_C_A)
LPDDR4_DQS0N_B: U1000.B11(DDR_DQS0N_B) U3800.V3(DQS0_C_B)
LPDDR4_DQS0P_A: U1000.G1(DDR_DQS0P_A) U3800.D3(DQS0_T_A)
LPDDR4_DQS0P_B: U1000.A11(DDR_DQS0P_B) U3800.W3(DQS0_T_B)
LPDDR4_DQS1N_A: U1000.L1(DDR_DQS1N_A) U3800.E10(DQS1_C_A)
LPDDR4_DQS1N_B: U1000.A15(DDR_DQS1N_B) U3800.V10(DQS1_C_B)
LPDDR4_DQS1P_A: U1000.L2(DDR_DQS1P_A) U3800.D10(DQS1_T_A)
LPDDR4_DQS1P_B: U1000.B15(DDR_DQS1P_B) U3800.W10(DQS1_T_B)
LPDDR4_ODT0_CA_A: U1000.C1(AC8) U3800.G2(ODT_CA_A)
LPDDR4_ODT0_CA_B: U1000.A8(AC7) U3800.T2(ODT_CA_B)
LPDDR4_RESETN: C3800.1 U1000.F11(AC29) U3800.T11(RESET_N)
MIPI_AVDD_0V9: C1601.1 C1701.1 C1703.1 U1000.W14(MIPI_CSI_RX_AVDD_0V9) U1000.W15(MIPI_DSI_TX1_AVDD_0V9) U1000.W16(MIPI_DSI_TX0/LVDS_TX0_AVDD_0V9)
MIPI_AVDD_1V8: C1600.1 C1700.1 C1702.1 U1000.Y14(MIPI_CSI_RX_AVDD_1V8) U1000.Y15(MIPI_DSI_TX1_AVDD_1V8) U1000.Y17(MIPI_DSI_TX0/LVDS_TX0_AVDD_1V8)
MIPI_CAM0_PDN_L_GPIO3_D5: U1000.AA5(GPIO3_D5_D)
